# Altium PCB PA_Combined_RX_TX.PcbDoc (part 1 of 3)
Units mil, origin at the board's own origin, x right, y up, seen from the top; angles counter-clockwise.
Board outline 4035 x 2725 mil, 4 copper layers (Top Layer, Layer 1, Layer 2, Bottom Layer), stack 23.756 mil thick; 184 components, 134 nets, 615 pads, 730 vias.
Unrouted connection lines stored in the file: 3.
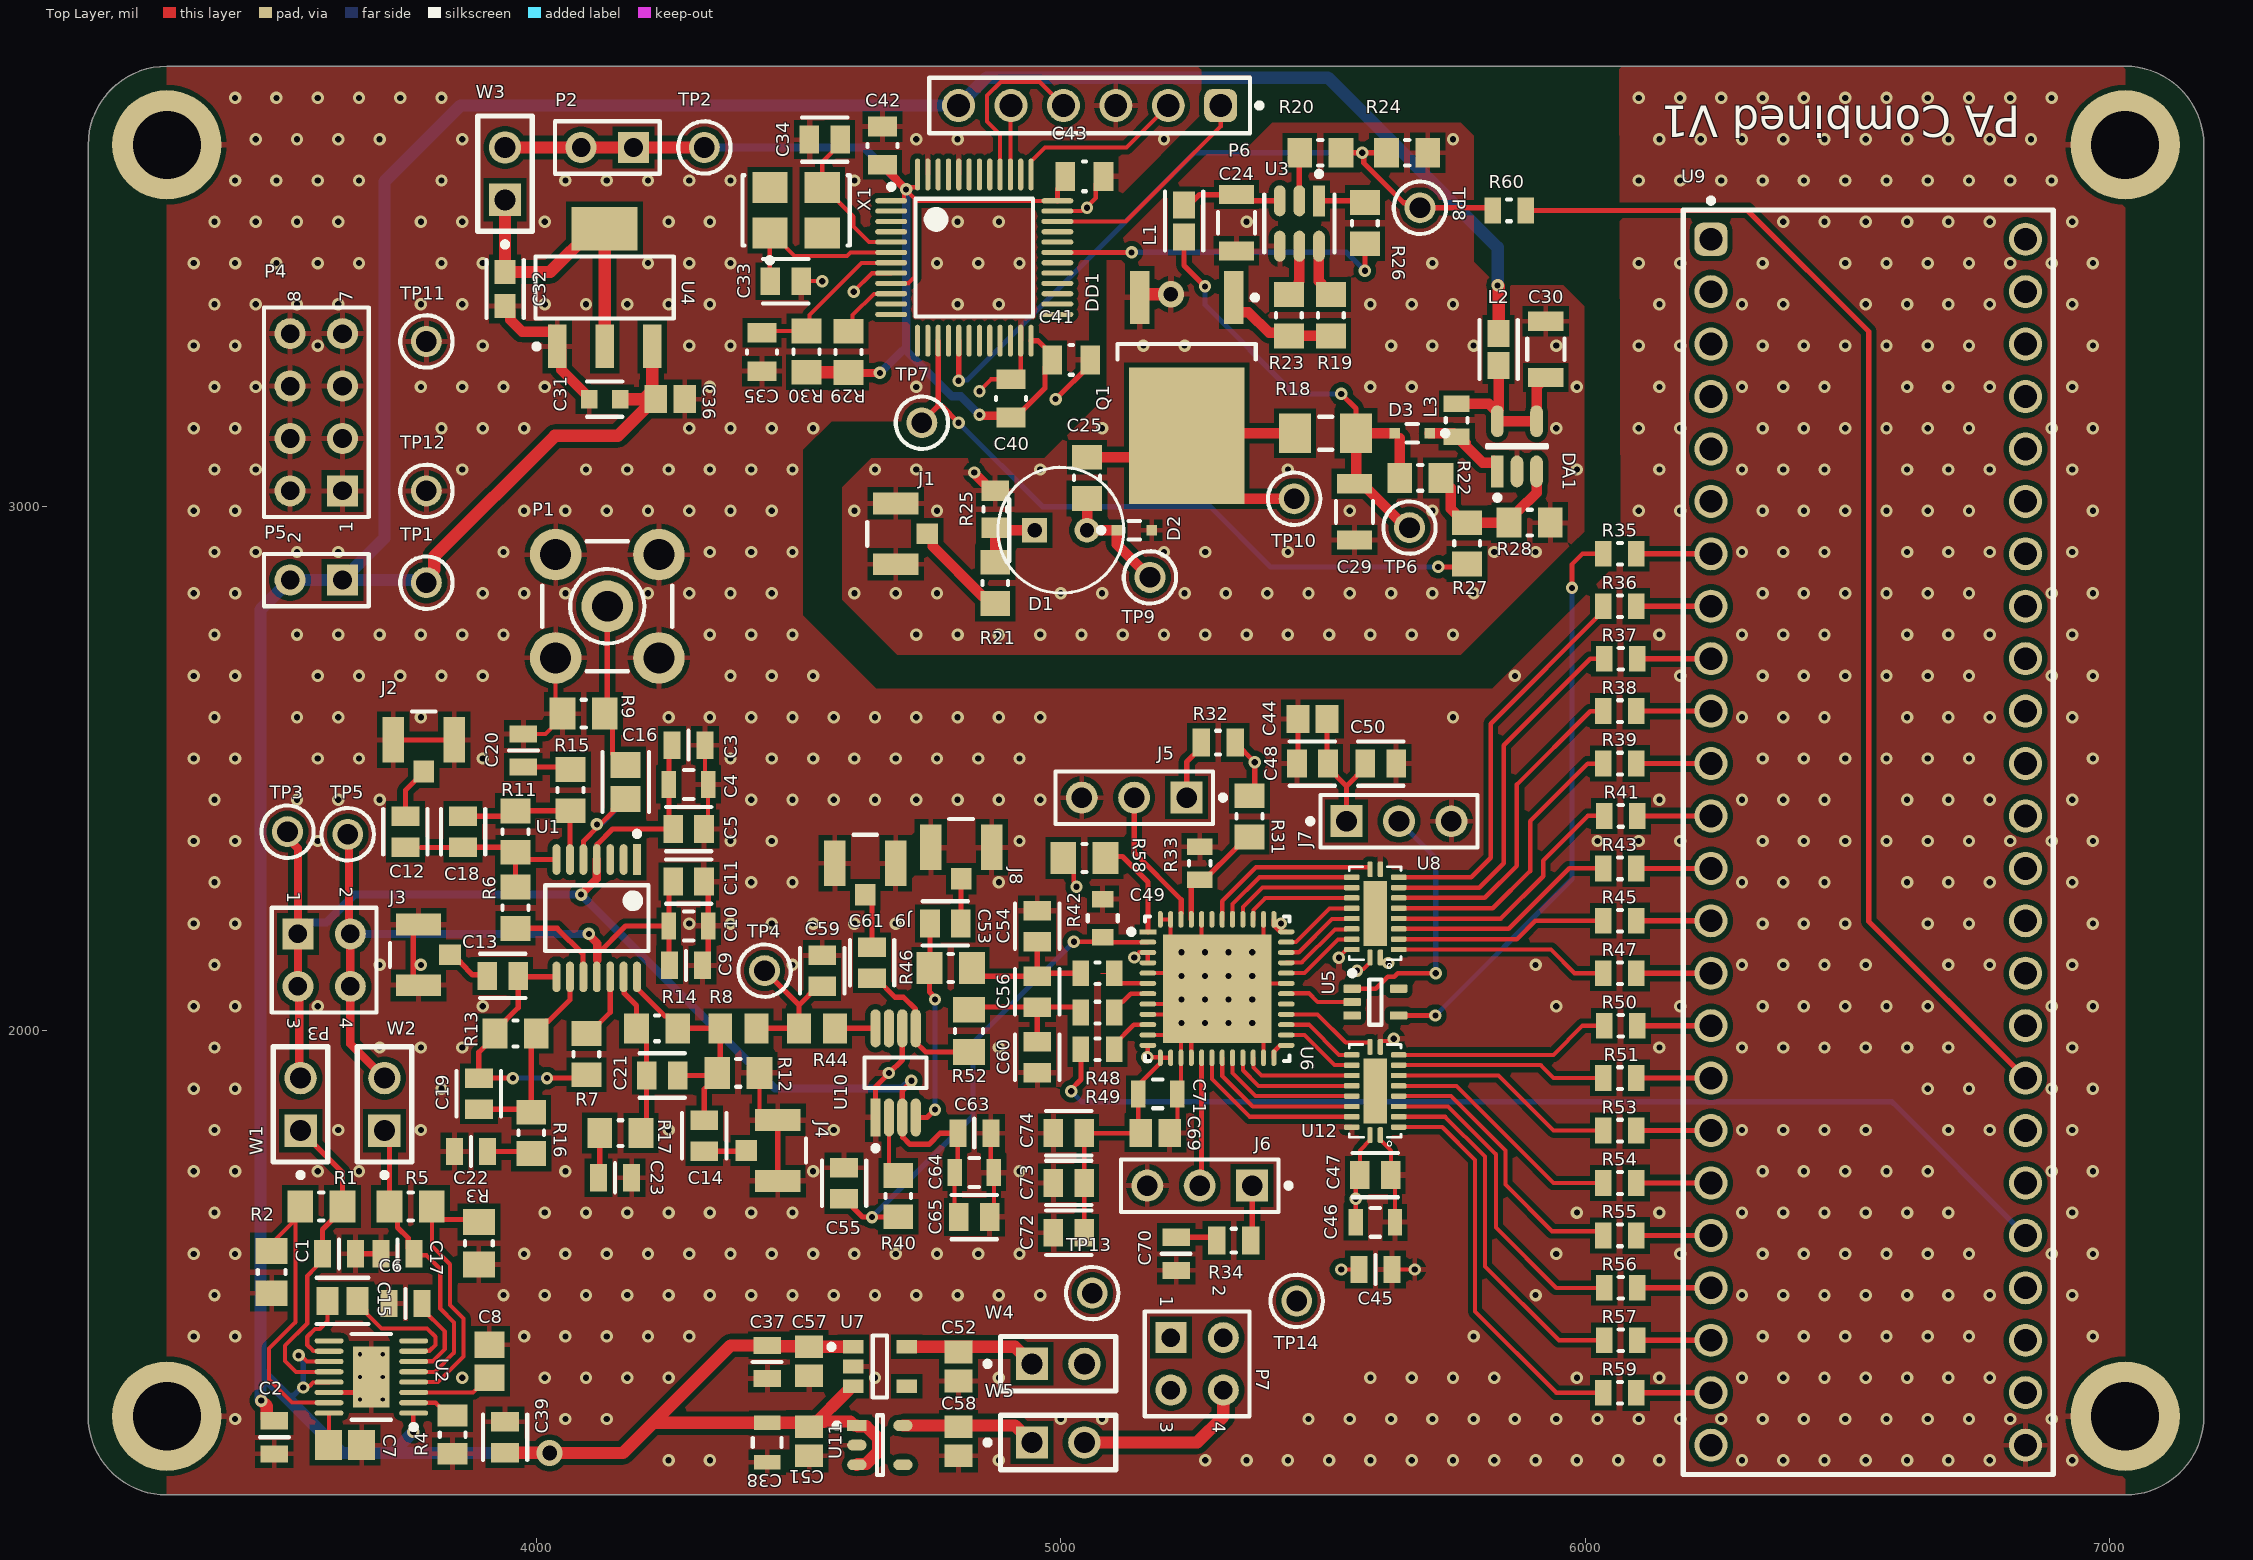
[diagram p0: Top Layer view]
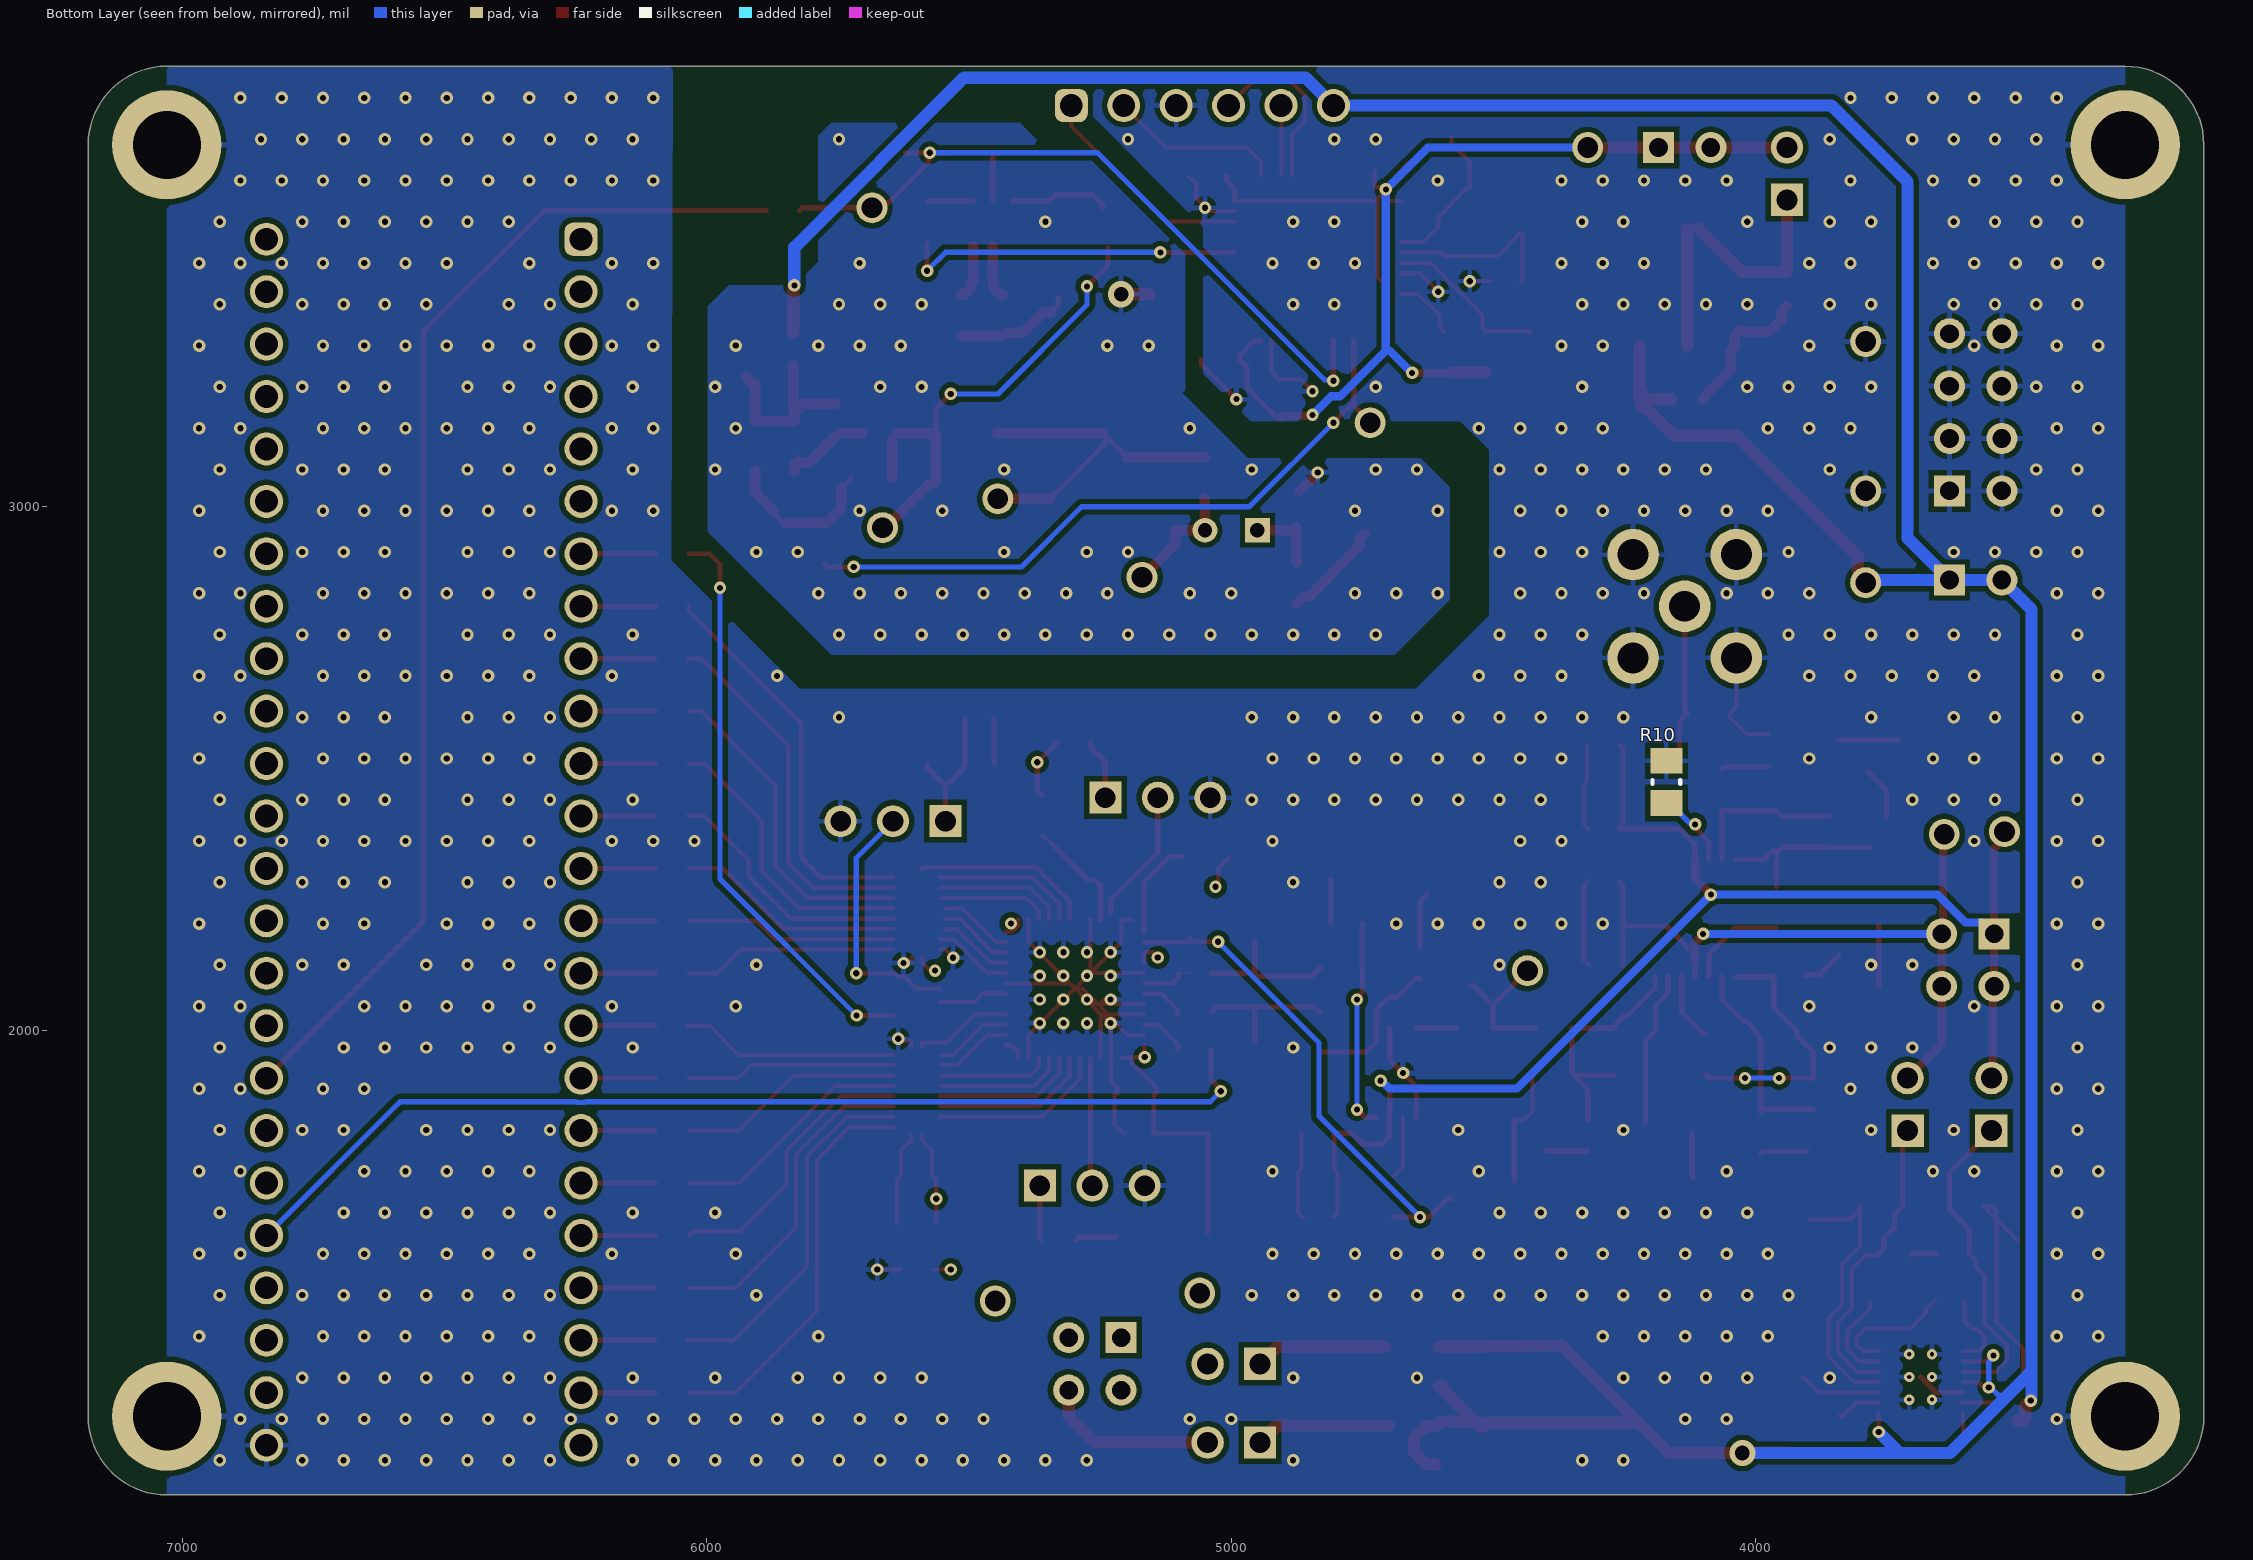
[diagram p1: Bottom Layer view, seen from below]
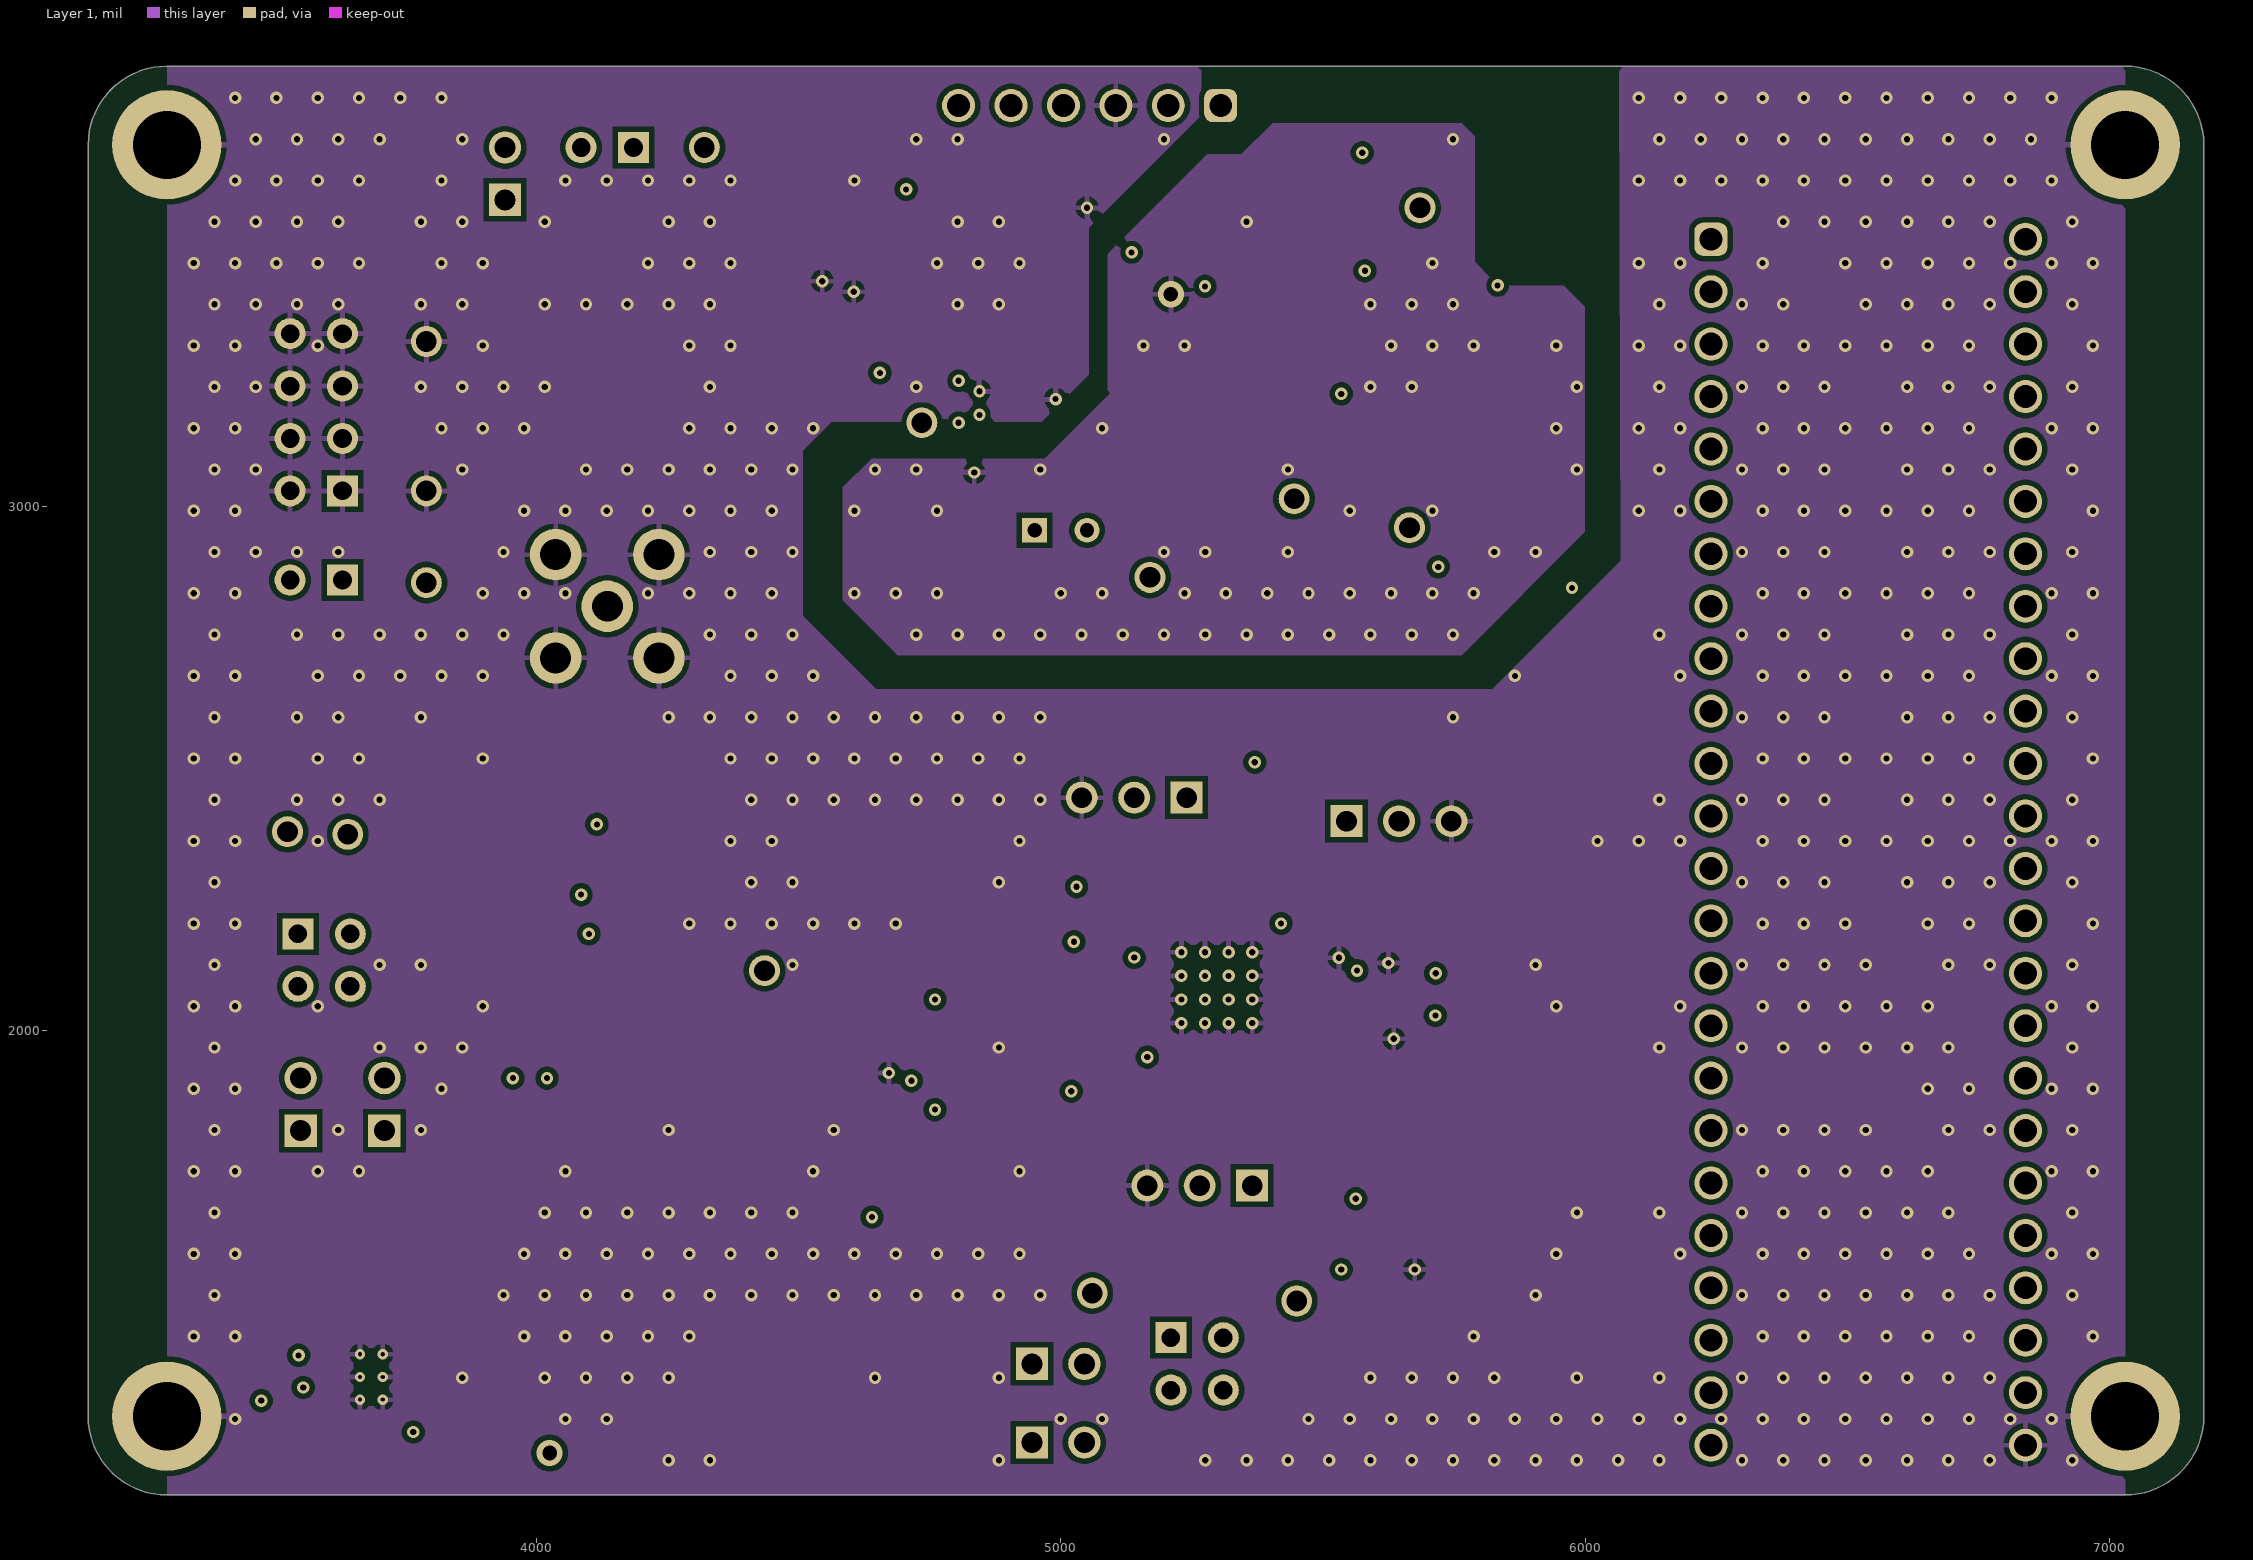
[diagram p2: Layer 1]
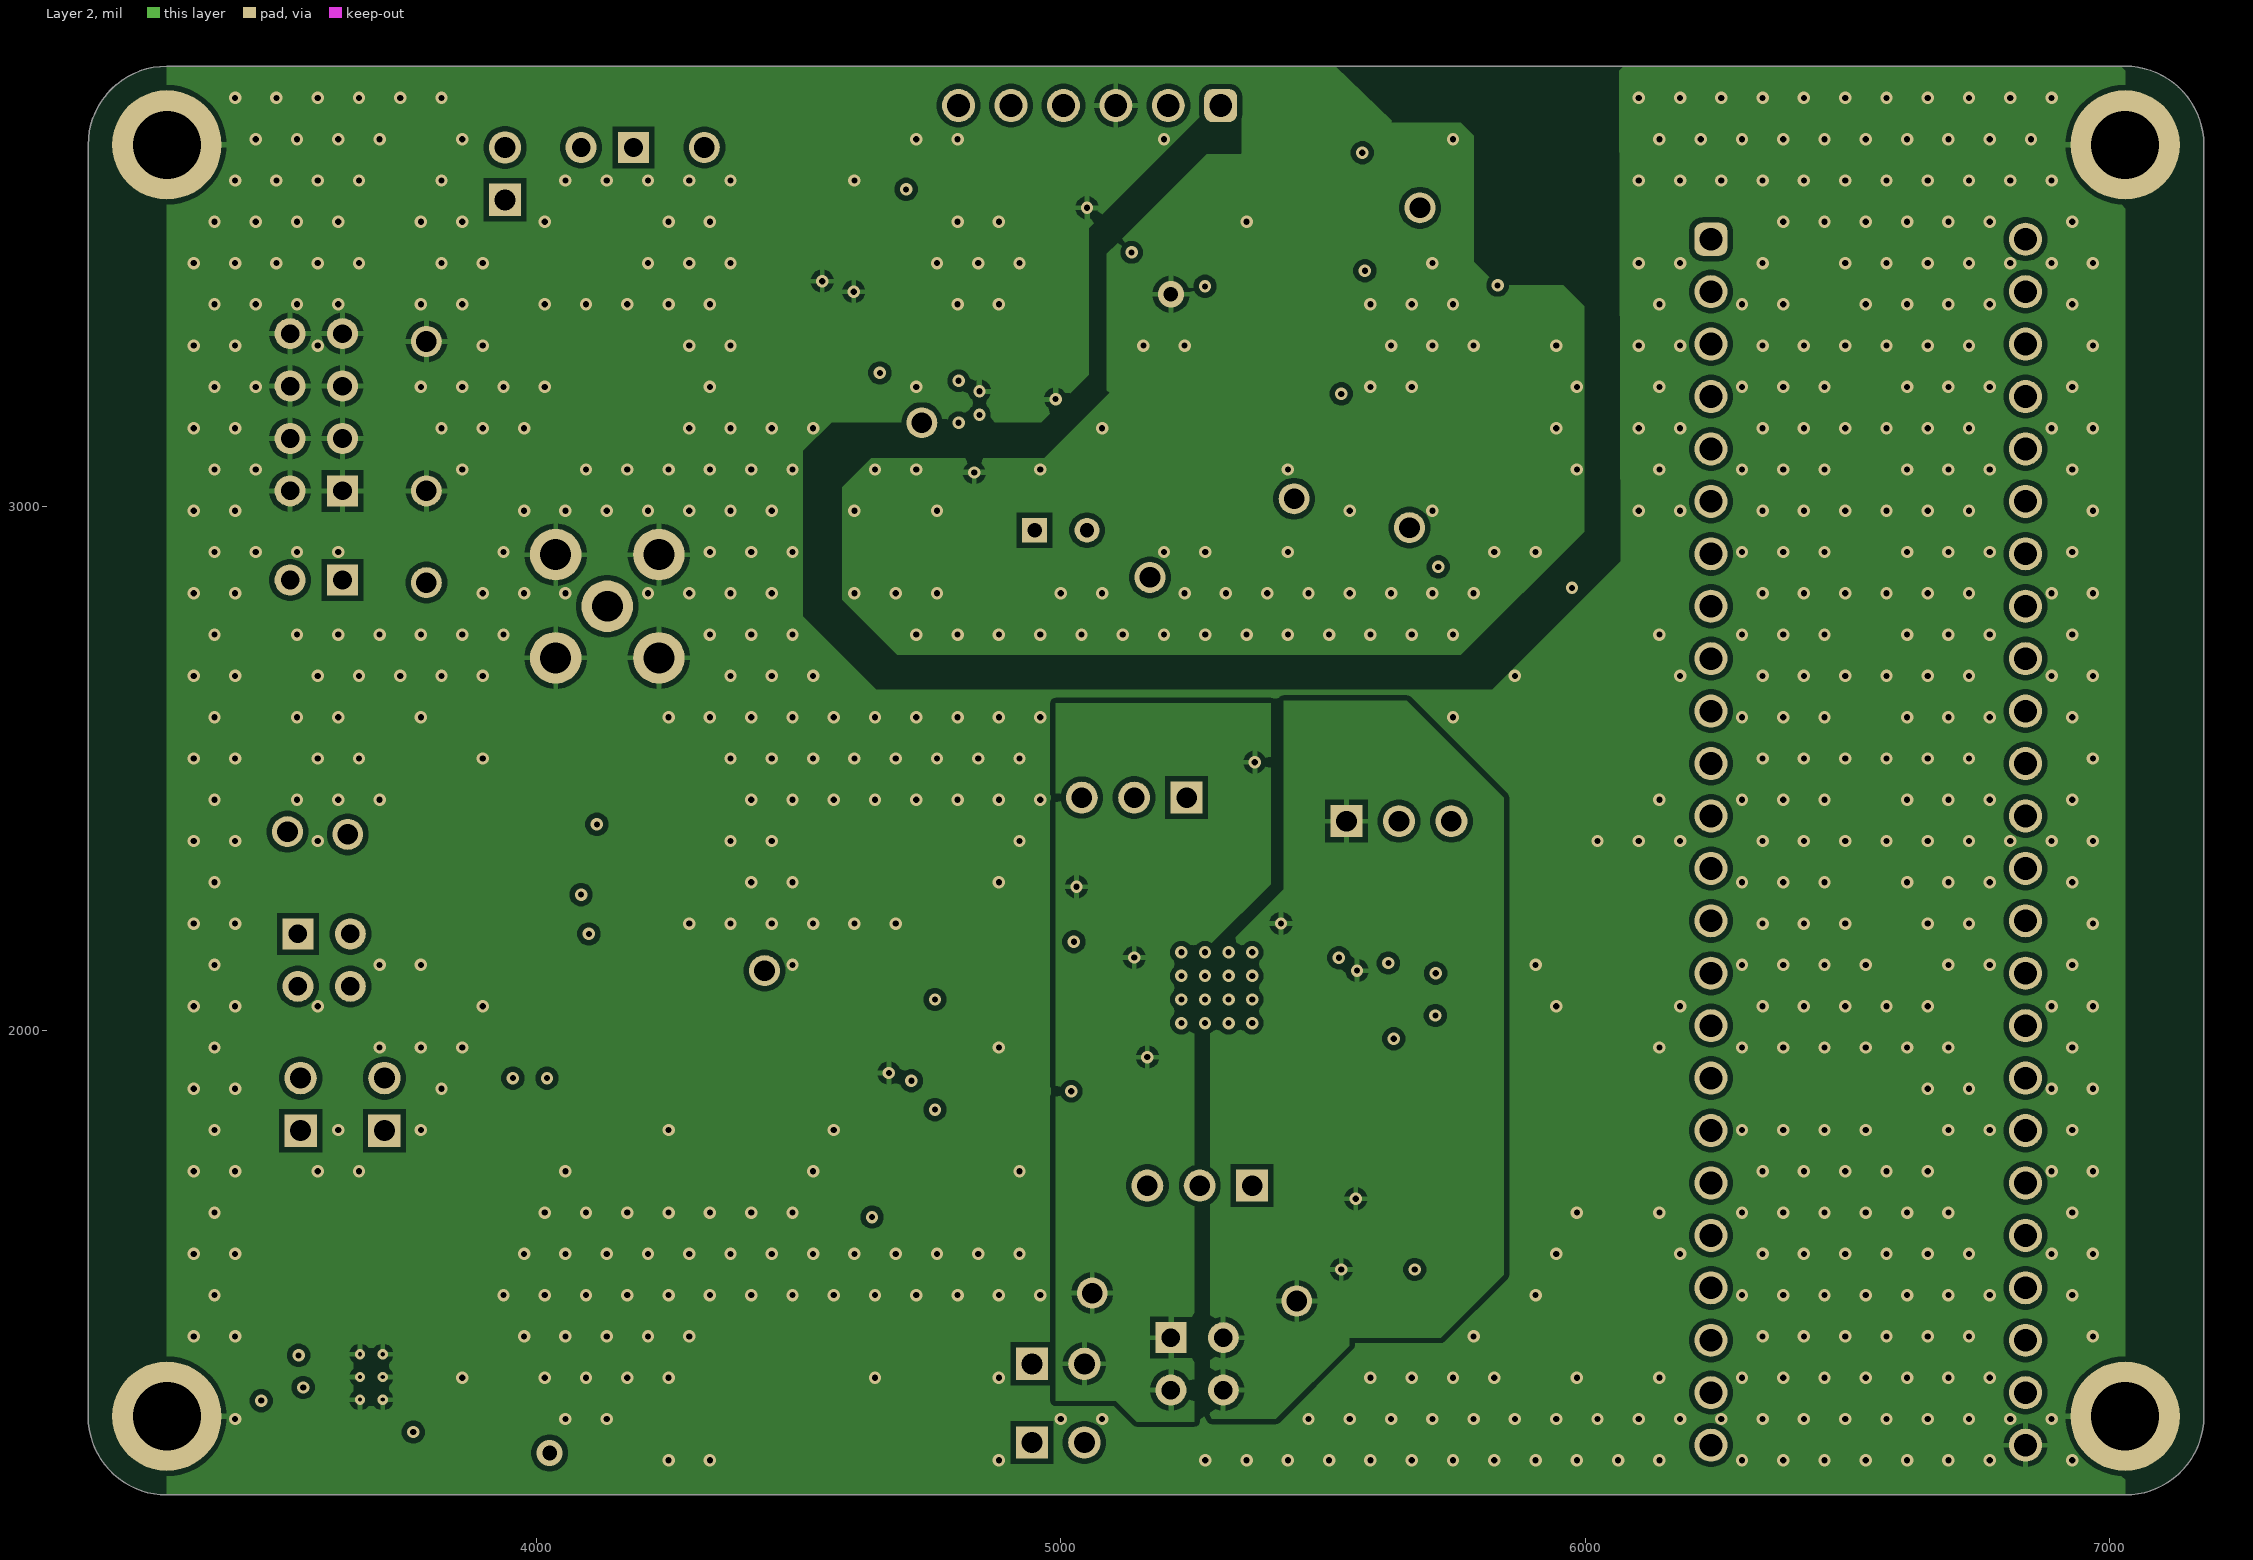
[diagram p3: Layer 2]

## Layer stack, top to bottom
Top Solder: solder mask 0.4, Solder Resist, Dk 3.5
Top Layer: signal copper 1.4
Dielectric 2: prepreg 2.8, PP-006, Dk 4.1
Layer 1: signal copper 1.378
Dielectric 1: dielectric 12.6, FR-4, Dk 4.8
Layer 2: signal copper 1.378
Dielectric 3: prepreg 2.8, PP-006, Dk 4.1
Bottom Layer: signal copper 1.4
Bottom Solder: solder mask 0.4, Solder Resist, Dk 3.5

## Board outline
3145,1265 ccw(c3295,1265) 3295,1115 7030,1115 ccw(c7030,1265) 7180,1265 7180,3690 ccw(c7030,3690) 7030,3840 3295,3840 ccw(c3295,3690) 3145,3690

## Design rules (kind name [scope] priority, off if disabled: settings)
Clearance [All] p1: gap=10 ignorepadtopadclearanceinfootprint=FALSE
ComponentClearance IgnoreLaserDiodeLol [InComponent('D1')] p1: gap=-999 collisioncheckmode=3 verticalgap=-999 showdistances=FALSE
ComponentClearance [All] p2: gap=10 collisioncheckmode=3 verticalgap=10 showdistances=FALSE
PolygonConnect [All] p1: connectstyle=Relief reliefconductorwidth=10 reliefentries=4 polygonreliefangle="90 Angle" airgapwidth=10
RoutingVias [All] p1: holewidth=11.81 width=23.62 viastyle="Through Hole" minholewidth=10 minwidth=19.68 maxholewidth=39.37 maxwidth=78.74
SolderMaskExpansion [All] p1: expansion=0 istentingtop=FALSE
SupplyNets "Schematic Supply Nets_3" [InNet('3V3')] p1: voltage=0.000
SupplyNets "Schematic Supply Nets_2" [InNet('VLASER')] p2: voltage=0.000
SupplyNets "Schematic Supply Nets_1" [InNet('GND')] p3: voltage=0.000
SupplyNets "Schematic Supply Nets" [InNet('VIN')] p4: voltage=0.000
Width [All] p1: maxlimit=23.62 minlimit=7.87 preferedwidth=10 midlayer1_minwidth=10 midlayer2_minwidth=10 bottomlayer_minwidth=10 minimp=50.000000 maximp=50.000000 favimp=50.000000
29 further rules are at their usual default settings.

## Components (designator, comment, footprint, x,y, rotation, side; value= is the part's Value field where it differs from the comment)
C1 "CL21B106KOQNNNG" FP-CL21B106KOQNNNG-MFG 3623.5,1575 r0 top value=10uF
C2 "CL21B106KOQNNNG" FP-CL21B106KOQNNNG-MFG 3500,1225 r270 top value=10uF
C3 "CL21B106KOQNNNG" FP-CL21B106KOQNNNG-MFG 4290,2545 r0 top value=10uF
C4 "GRM21BR71C475KE51K" FP-GRM21B-0_15-MFG 4290,2470 r0 top
C5 "C0805C104K5RACTU" FP-C0805C-DN-MFG 4290,2385 r0 top value="0.10 μF"
C6 "CL21B106KOQNNNG" FP-CL21B106KOQNNNG-MFG 3750,1480 r180 top value=10uF
C7 "C0805F103K5RACTU" CAPC2013X100X50NL20T25 3635,1210 r180 top
C8 "C0805F103K5RACTU" CAPC2013X100X50NL20T25 3910,1370 r270 top
C9 "CL21B106KOQNNNG" FP-CL21B106KOQNNNG-MFG 4285,2125 r0 top value=10uF
C10 "GRM21BR71C475KE51K" FP-GRM21B-0_15-MFG 4290,2200 r0 top
C11 "C0805C104K5RACTU" FP-C0805C-DN-MFG 4290,2285 r0 top value="0.10 μF"
C12 "C0805C102K5RACTU" FP-C0805C-DN-MFG 3750,2380 r270 top value="1,000 pF"
C13 "C0805C102K5RACTU" FP-C0805C-DN-MFG 3935.47,2105 r0 top value="1,000 pF"
C14 "C0805C102K5RACTU" FP-C0805C-DN-MFG 4320,1800 r90 top value="1,000 pF"
C15 "CL21B105KAFNNNG" FP-CL21-IPC_C 3630,1485 r0 top
C16 "CL21B222JBANNNC" FP-CL21-IPC_B 4170,2475 r270 top
C17 "CL21B106KOQNNNG" FP-CL21B106KOQNNNG-MFG 3735,1575 r180 top value=10uF
C18 "C0805C150K5RACTU" FP-C0805C-DN-MFG 3860,2380 r270 top value="15 pF"
C19 "C0805C150K5RACTU" FP-C0805C-DN-MFG 3890,1880 r90 top value="15 pF"
C20 "CL21B106KOQNNNG" FP-CL21B106KOQNNNG-MFG 3975,2535 r90 top value=10uF
C21 "C0805C150K5RACTU" FP-C0805C-DN-MFG 4239.53,1915 r0 top value="15 pF"
C22 "CL21B106KOQNNNG" FP-CL21B106KOQNNNG-MFG 3875,1770 r180 top value=10uF
C23 "CL21B106KOQNNNG" FP-CL21B106KOQNNNG-MFG 4150,1720 r0 top value=10uF
C24 "10uF" FP-CL31B106KBHNNNE-MFG 5335,3541.36 r90 top
C25 "20nF" RESC2013X60X35ML10T20 5050,3055 r90 top
C29 "10uF" FP-CL31B106KBHNNNE-MFG 5560,2990 r90 top
C30 "10uF" FP-CL31B106KBHNNNE-MFG 5925,3300 r270 top
C31 "" FP-CC0603-DA-MFG 4130,3205 r180 top value="100 nF"
C32 "" FP-CL10-IPC_A 3940,3415 r270 top
C33 "C0805C100J5RACTU" FP-C0805C-DN-MFG 4475.47,3430 r180 top value="10 pF"
C34 "" FP-C0805C-DN-MFG 4550,3700 r0 top value="10 pF"
C35 "100nF" FP-CC0805-0_85-MFG 4430,3295 r270 top value="100 nF"
C36 "C0805C105K3RACTU" CAPC2013X140X50LL20T25 4255,3205 r180 top
C37 "CL21B106KOQNNNG" FP-CL21B106KOQNNNG-MFG 4440,1368.5 r270 top value=10uF
C38 "GRM21BR71C475KE51K" FP-GRM21B-0_15-MFG 4440,1215 r270 top
C39 "C0805C104K5RACTU" FP-C0805C-DN-MFG 3940,1225 r90 top value="0.10 μF"
C40 "CC0805KRX7R9BB104" FP-CC0805-0_85-MFG 4905,3206.42 r90 top value="100 nF"
C41 "CC0805KRX7R9BB104" FP-CC0805-0_85-MFG 5020,3280 r0 top value="100 nF"
C42 "CC0805KRX7R9BB104" FP-CC0805-0_85-MFG 4660,3688.58 r90 top value="100 nF"
C43 "CC0805KRX7R9BB104" FP-CC0805-0_85-MFG 5045,3630 r0 top value="100 nF"
C44 "C0805C105K3RACTU" CAPC2013X140X50LL20T25 5480,2595 r0 top
C45 "CL21B106KOQNNNG" FP-CL21B106KOQNNNG-MFG 5600,1545 r0 top value=10uF
C46 "GRM21BR71C475KE51K" FP-GRM21B-0_15-MFG 5600,1635 r0 top
C47 "C0805C104K5RACTU" FP-C0805C-DN-MFG 5600,1725 r0 top value="0.10 μF"
C48 "C0805C104K5RACTU" FP-C0805C-DN-MFG 5480,2510 r180 top value="0.10 μF"
C49 "C2012X7R1C225K125AB" FP-C2012-125-0_2-MFG 5080,2215 r90 top
C50 "C0805C104K5RACTU" FP-C0805C-DN-MFG 5610,2510 r0 top value="0.10 μF"
C51 "C0805C105K3RACTU" CAPC2013X140X50LL20T25 4520,1217.44 r90 top
C52 "C0805C105K3RACTU" CAPC2013X140X50LL20T25 4805,1360 r90 top
C53 "C0805C102K5RACTU" FP-C0805C-DN-MFG 4780,2205 r180 top value="1,000 pF"
C54 "C0805C100J5RACTU" FP-C0805C-DN-MFG 4955,2200 r270 top value="10 pF"
C55 "C0805C104K5RACTU" FP-C0805C-DN-MFG 4586.65,1709.53 r90 top value="0.10 μF"
C56 "C0805C100J5RACTU" FP-C0805C-DN-MFG 4955,2075 r270 top value="10 pF"
C57 "C0805C105K3RACTU" CAPC2013X140X50LL20T25 4520,1370 r90 top
C58 "C0805C105K3RACTU" CAPC2013X140X50LL20T25 4805,1217.44 r90 top
C59 "C0805C100J5RACTU" FP-C0805C-DN-MFG 4545,2115 r90 top value="10 pF"
C60 "C0805C100J5RACTU" FP-C0805C-DN-MFG 4955,1950 r270 top value="10 pF"
C61 "C0805C102K5RACTU" FP-C0805C-DN-MFG 4640,2130 r90 top value="1,000 pF"
C63 "CL21B106KOQNNNG" FP-CL21B106KOQNNNG-MFG 4835,1805 r0 top value=10uF
C64 "GRM21BR71C475KE51K" FP-GRM21B-0_15-MFG 4835,1730 r0 top
C65 "C0805C104K5RACTU" FP-C0805C-DN-MFG 4835,1645 r0 top value="0.10 μF"
C69 "C0805C105K3RACTU" CAPC2013X140X50LL20T25 5180,1805 r180 top
C70 "CL21B106KOQNNNG" FP-CL21B106KOQNNNG-MFG 5220,1575 r270 top value=10uF
C71 "GRM21BR71C475KE51K" FP-GRM21B-0_15-MFG 5185,1880 r0 top
C72 "C0805C104K5RACTU" FP-C0805C-DN-MFG 5015.47,1615 r180 top value="0.10 μF"
C73 "C0805C104K5RACTU" FP-C0805C-DN-MFG 5015,1710 r180 top value="0.10 μF"
C74 "C0805C104K5RACTU" FP-C0805C-DN-MFG 5015,1805 r180 top value="0.10 μF"
D1 "Light-Emitting Diode" FP-DPGEW1S09H-MFG 5000,2955 r0 top
D2 "Schottky Diode" FP-PG-SC79-2-MFG 5140,2955 r0 top
D3 "Schottky Diode" FP-PG-SC79-2-MFG 5670,3140 r180 top
DA1 "MIC2288YD5-TR" FP-TSOT-5LD-PL-1-IPC_A 5870,3115 r90 top
DD1 "STM32F303CBT6" STM-LQFP48_L 4835,3475 r0 top
J1 "U.FL-R-SMT(10)" FP-U_FL-R-SMT_10-MFG 4685,2948.07 r270 top
J2 "U.FL-R-SMT-1(10)" FP-U_FL-R-SMT-1_10-MFG 3785,2555 r180 top
J3 "U.FL-R-SMT-1(10)" FP-U_FL-R-SMT-1_10-MFG 3775,2145 r270 top
J4 "U.FL-R-SMT-1(10)" FP-U_FL-R-SMT-1_10-MFG 4460,1771.93 r90 top
J5 "90120-0123" FP-90120-0123-MFG 5140,2445 r180 top
J6 "90120-0123" FP-90120-0123-MFG 5265,1705 r180 top
J7 "90120-0123" FP-90120-0123-MFG 5645,2400 r0 top
J8 "U.FL-R-SMT-1(10)" FP-U_FL-R-SMT-1_10-MFG 4810,2350 r180 top
J9 "U.FL-R-SMT-1(10)" FP-U_FL-R-SMT-1_10-MFG 4626.93,2320 r180 top
L1 "BEAD" FP-BLM18-0_15-t0_8-IPC_A 5235,3544.45 r90 top
L2 "BEAD" FP-BLM18-0_15-t0_8-IPC_A 5835,3300 r90 top
L3 "Inductor" RESC2013X60X35LL10T20 5755,3165 r270 top value=10uH
P1 "SMB" SMB_V-RJ45 4135,2810 r270 top
P2 "Header 2" HDR1X2 4185,3685 r180 top
P3 "Header 2X2" HDR2X2 3545,2185 r270 top
P4 "Header 4X2" HDR2X4 3630,3030 r90 top
P5 "Header 2" HDR1X2 3630,2860 r180 top
P6 "61300611121" 61300611121 5055,3765 r180 top
P7 "Header 2X2" HDR2X2 5210,1415 r270 top
Q1 "" INF-PG-TO252-3-313_N 5240,3227.52 r270 top
R1 "63k" RESC2013X60X30ML20T20 3589.64,1665 r0 top
R2 "20k" RESC2013X60X30ML20T20 3495,1540 r90 top
R3 "20k" RESC2013X60X30ML20T20 3890,1595 r270 top
R4 "CRCW0805200KFKEA" RESC2013X50X30NL20T20 3840,1230 r90 top
R5 "63k" RESC2013X60X30ML20T20 3760,1665 r0 top
R6 "RC0805FR-071KL" RESC2013X60X35ML10T20 3960,2235 r270 top
R7 "RC0805FR-071KL" RESC2013X60X35ML10T20 4095,1955.63 r90 top
R8 "ERJ-6GEY0R00V" RESC2013X70X40NL20T20 4385,2005 r0 top
R9 "RK73B2ATTD510J" RESC2013X60X30ML20T20 4090,2605 r0 top
R10 "RK73B2ATTD510J" RESC2013X60X30ML20T20 4170,2475 r270 bottom
R11 "RC0805FR-071KL" RESC2013X60X35ML10T20 3960,2380 r270 top
R12 "RK73B2ATTD510J" RESC2013X60X30ML20T20 4385,1920 r180 top
R13 "RC0805FR-071KL" RESC2013X60X35ML10T20 3960,1995 r180 top
R14 "RC0805FR-071KL" RESC2013X60X35ML10T20 4230,2005 r0 top
R15 "RC0805FR-07100RL" RESC2013X60X35ML10T20 4065,2459.37 r90 top
R16 "RC0805FR-07100RL" RESC2013X60X35ML10T20 3990,1805.63 r270 top
R17 "RC0805FR-07100RL" RESC2013X60X35ML10T20 4160,1805 r180 top
R18 "270" FP-CL31B106KBHNNNE-IPC_A 5505,3140 r0 top
R19 "15" RESC2013X60X35ML10T20 5515,3365 r90 top
R20 "1K" RESC2013X60X35ML10T20 5495,3675 r0 top
R21 "47" RESC2013X60X35ML10T20 4875,2854.37 r270 top
R22 "84.6K" RESC2013X60X35ML10T20 5685.63,3055 r180 top
R23 "0" RESC2013X60X35ML10T20 5435,3365 r90 top
R24 "1K" RESC2013X60X35ML10T20 5660.63,3675 r180 top
R25 "0.1" RESC2013X60X35NL10T20 4875,2995 r270 top
R26 "1K" RESC2013X60X35ML10T20 5580,3540.63 r90 top
R27 "10K" RESC2013X60X35ML10T20 5775,2930 r90 top
R28 "4.7K" RESC2013X60X35ML10T20 5894.29,2969.37 r180 top
R29 "NC" RESC2013X60X35ML10T20 4595,3295 r90 top
R30 "10K" RESC2013X60X35ML10T20 4515,3295.63 r90 top
R31 "RC0805FR-071KL" RESC2013X60X35ML10T20 5360,2409.37 r90 top
R32 "RK73H2ATTD1002F" RESC2013X60X30LL20T20 5300,2550 r0 top
R33 "Resistor" RESC2013X60X35LL10T20 5265,2320 r270 top value=open
R34 "RK73H2ATTD1002F" RESC2013X60X30LL20T20 5330,1600 r180 top
R35 "RC0805FR-0733RL" RESC2013X60X35LL10T20 6066.5,2910 r0 top
R36 "RC0805FR-0733RL" RESC2013X60X35LL10T20 6066.5,2810 r0 top
R37 "RC0805FR-0733RL" RESC2013X60X35LL10T20 6067.99,2710 r0 top
R38 "RC0805FR-0733RL" RESC2013X60X35LL10T20 6066.5,2610 r0 top
R39 "RC0805FR-0733RL" RESC2013X60X35LL10T20 6066.5,2510 r0 top
R40 "RC0805FR-07100RL" RESC2013X60X35ML10T20 4690,1685 r90 top
R41 "RC0805FR-0733RL" RESC2013X60X35LL10T20 6067.99,2410 r0 top
R42 "RC0805JR-075R1L" RESC2013X60X35LL10T20 5070,2110 r0 top
R43 "RC0805FR-0733RL" RESC2013X60X35LL10T20 6066.5,2310 r0 top
R44 "ERJ-6GEY0R00V" RESC2013X70X40NL20T20 4535,2005 r0 top
R45 "RC0805FR-0733RL" RESC2013X60X35LL10T20 6066.5,2210 r0 top
R46 "RK73B2ATTD510J" RESC2013X60X30ML20T20 4790,2120 r180 top
R47 "RC0805FR-0733RL" RESC2013X60X35LL10T20 6066.5,2110 r0 top
R48 "RC0805JR-075R1L" RESC2013X60X35LL10T20 5070,2035 r0 top
R49 "RC0805FR-0733RL" RESC2013X60X35LL10T20 5070,1965 r0 top
R50 "RC0805FR-0733RL" RESC2013X60X35LL10T20 6067.99,2010 r0 top
R51 "RC0805FR-0733RL" RESC2013X60X35LL10T20 6066.5,1910 r0 top
R52 "RK73B2ATTD510J" RESC2013X60X30ML20T20 4825,2000 r270 top
R53 "RC0805FR-0733RL" RESC2013X60X35LL10T20 6066.5,1810 r0 top
R54 "RC0805FR-0733RL" RESC2013X60X35LL10T20 6066.5,1710 r0 top
R55 "RC0805FR-0733RL" RESC2013X60X35LL10T20 6066.5,1610 r0 top
R56 "RC0805FR-0733RL" RESC2013X60X35LL10T20 6067.99,1510 r0 top
R57 "RC0805FR-0733RL" RESC2013X60X35LL10T20 6067.99,1410 r0 top
R58 "RK73H2ATTD10R0F" RESC2013X60X30ML20T20 5045,2330 r180 top
R59 "RC0805FR-0733RL" RESC2013X60X35LL10T20 6066.5,1310 r0 top
R60 "RC0805FR-0733RL" RESC2013X60X35LL10T20 5855,3565 r180 top
TP1 "5003" TP_TH 3790,2855 r90 top
TP2 "5003" TP_TH 4320.21,3685 r0 top
TP3 "5003" TP_TH 3525,2380 r0 top
TP4 "5003" TP_TH 4435,2115 r0 top
TP5 "5003" TP_TH 3640,2375 r90 top
TP6 "5003" TP_TH 5665,2960 r0 top
TP7 "5003" TP_TH 4735,3160 r90 top
TP8 "5003" TP_TH 5685,3570 r0 top
TP9 "5003" TP_TH 5170,2865 r0 top
TP10 "5003" TP_TH 5445,3015 r90 top
TP11 "5003" TP_TH 3790,3315 r90 top
TP12 "5003" TP_TH 3790,3030 r90 top
TP13 "5003" TP_TH 5060,1500 r90 top
TP14 "5003" TP_TH 5450,1485 r90 top
U1 "ADA4807-4ARUZ-R7" FP-RU-14-IPC_B 4115,2215 r270 top
U2 "LTC3260EMSE#TRPBF" LT-MSE-16-EDP_L 3685,1340 r180 top
U3 "UCC27531DBVR" FP-DBV0006A-IPC_B 5455,3540 r270 top
U4 "LD1117S33TR" SOT-223_L 4130,3417.8 r90 top
U5 "SN74AUC1G86DCKR" DCK0005A_N 5600,2055 r0 top
U6 "LTC2203CUK#TRPBF" FP-UK-48-05-08-1704-IPC_C 5298.06,2080.79 r0 top
U7 "MIC5501-3.0YM5-TR" FP-SOT23-5LD-PL-1-MFG 4655,1360 r0 top
U8 "74VCX245BQX" QFN21P50_450X250X80L40X24T305X105N 5599.69,2224.21 r90 top
U9 "CMOD_A7_35" "PCBComponent_1 - duplicate" 6145.59,2570.47 r0 top
U10 "LTC6363IMS8-0.5#PBF" FP-MS8-8-05-08-1660-IPC_A 4685,1920 r90 top
U11 "MIC5365-3.3YD5-TR" FP-TSOT-5LD-PL-1-IPC_C 4655,1210 r0 top
U12 "74VCX245BQX" QFN21P50_450X250X80L40X24T305X105N 5599.69,1885.47 r90 top
W1 "Jumper" FP-M20-9990246-MFG 3550,1860 r90 top
W2 "Jumper" FP-M20-9990246-MFG 3710,1860 r90 top
W3 "Jumper" FP-M20-9990246-MFG 3940,3635 r90 top
W4 "Jumper" FP-M20-9990246-MFG 4995,1365 r0 top
W5 "Jumper" FP-M20-9990246-MFG 4995,1215 r0 top
X1 "Quartz" FP-ASFL1-MFG 4495,3565 r0 top value="8 MHz"

## Footprints (in the part's own frame and the unit in brackets; to place one, negate y for a bottom-side part, rotate by r counter-clockwise, add the part's x,y. Pads: shape width x height; smd on the part's side, far side on the other; paste and mask are expansions set on the pad)
61300611121 [mm] "Pin Header, pitch 2.54 mm, THT, Vertical, single row, 6p"
  rrect50% 1.6x1.6 hole 1.1: 1(-6.35,0)
  round 1.6 hole 1.1: 2(-3.81,0) 3(-1.27,0) 4(1.27,0) 5(3.81,0) 6(6.35,0)
  silkscreen extent -8.34,-1.34 7.77,1.34, body extent -7.62,-1.27 7.62,1.27, height 8.57
CAPC2013X100X50NL20T25 [mm] "Chip Capacitor, 2-Leads, Body 2.00x1.25mm, IPC Medium Density"
  rect 1.3x1.45 smd: 1(-0.8,0) 2(0.8,0)
  body extent -1.1,-0.72 1.1,0.72, height 1
CAPC2013X140X50LL20T25 [mm] "Chip Capacitor, 2-Leads, Body 2.00x1.25mm, IPC High Density"
  rect 1.1x1.35 smd: 1(-0.7,0) 2(0.7,0)
  body extent -1.1,-0.72 1.1,0.72, height 1.4
DCK0005A_N [mm] "SOT23, 5-Leads, Body 2.15x1.4mm, Pitch 0.65mm, IPC Medium Density"
  rrect25% 0.85x0.4 smd: 1(-1.125,0.65) 2(-1.125,0) 3(-1.125,-0.65) 4(1.125,-0.65) 5(1.125,0.65)
  silkscreen extent -1.25,-1.1 0.3,1.52, body extent -1.14,-1 1.14,1, height 0.94
FP-90120-0123-MFG [mm]
  rect 1.55x1.55 hole 1 paste-2539.97 mask+0: 1(-2.54,0)
  round 1.55 hole 1 paste-2539.97 mask+0: 2(0,0) 3(2.54,0)
  silkscreen extent -4.43,-1.27 3.81,1.27, body extent -3.91,-1.37 3.91,1.37, height 0.25
FP-ASFL1-MFG [mm]
  rect 1.7x1.5 smd paste+0 mask+0: 1(-1.27,-1.1) 2(1.27,-1.1) 3(1.27,1.1) 4(-1.27,1.1)
  silkscreen extent -2.6,-2.54 2.6,1.7, body extent -2.7,-1.95 2.7,1.95, height 0.25
FP-BLM18-0_15-t0_8-IPC_A [mil]
  rect 51.42x41.66 smd paste+0 mask+0: 1(-30.55,0) 2(30.55,0)
  silkscreen extent -56,-37 56,37, body extent -76,-41 76,41, height 10
FP-C0805C-DN-MFG [mm]
  rect 0.95x1.35 smd paste+0 mask+0: 1(-0.75,0) 2(0.75,0)
  silkscreen extent -1.1,-1.08 1.1,1.07, body extent -1.4,-0.85 1.4,0.85, height 0.25
FP-C2012-125-0_2-MFG [mm]
  rect 0.8x1.05 smd paste+0 mask+0: 1(-0.925,0) 2(0.925,0)
  silkscreen extent -0.15,-0.73 0.15,0.73, body extent -1.43,-0.82 1.43,0.82, height 0.25
FP-CC0603-DA-MFG [mm]
  rect 0.8x0.9 smd paste+0 mask+0: 1(-0.75,0) 2(0.75,0)
  silkscreen extent -0.85,-0.85 0.85,0.85, body extent -1.35,-0.75 1.35,0.75, height 0.25
FP-CC0805-0_85-MFG [mm]
  rect 0.95x1.4 smd paste+0 mask+0: 1(-0.925,0) 2(0.925,0)
  silkscreen extent -0.07,-0.73 0.07,0.73, body extent -1.6,-1.05 1.6,1.05, height 0.25
FP-CL10-IPC_A [mil]
  rect 45.6x39.85 smd paste+0 mask+0: 1(-32.56,0) 2(32.56,0)
  silkscreen extent -55,-36 55,36, body extent -75,-40 75,40, height 10
FP-CL21-IPC_B [mil]
  rect 49.4x57.33 smd paste+0 mask+0: 1(-32.51,0) 2(32.51,0)
  silkscreen extent -57,-44 57,44, body extent -67,-39 67,39, height 10
FP-CL21-IPC_C [mil]
  rect 41.52x53.39 smd paste+0 mask+0: 1(-28.57,0) 2(28.57,0)
  silkscreen extent -49,-44 49,44, body extent -53,-32 53,32, height 10
FP-CL21B106KOQNNNG-MFG [mm]
  rect 0.825x1.325 smd paste+0 mask+0: 1(-0.8,0) 2(0.8,0)
  silkscreen extent 0,-0.7 0,0.7, body extent -1.31,-0.8 1.31,0.8, height 0.25
FP-CL31B106KBHNNNE-IPC_A [mil]
  rect 61.2x75.05 smd paste+0 mask+0: 1(-58.11,0) 2(58.11,0)
  silkscreen extent -13,-31 13,31, body extent -108,-57 108,57, height 10
FP-CL31B106KBHNNNE-MFG [mm]
  rect 0.925x1.7 smd paste+0 mask+0: 1(-1.363,0) 2(1.363,0)
  silkscreen extent -0.53,-0.9 0.53,0.9, body extent -1.92,-1 1.92,1, height 0.25
FP-DBV0006A-IPC_B [mm]
  rect 1.505x0.57 smd paste+0 mask+0: 1(-1.1,0.95)
  rrect100% 1.505x0.57 smd paste+0 mask+0: 2(-1.1,0) 3(-1.1,-0.95) 4(1.1,-0.95) 5(1.1,0) 6(1.1,0.95)
  silkscreen extent -2.53,-1.7 1.4,1.7, body extent -2.1,-1.7 2.1,1.7, height 0.25
FP-DPGEW1S09H-MFG [mm]
  rect 1.2x1.2 hole 0.7 paste-2539.97 mask+0: 1(-1.27,0)
  round 1.2 hole 0.7 paste-2539.97 mask+0: 2(1.27,0)
  silkscreen extent -3.05,-3.05 3.05,3.05, body extent -3.15,-3.15 3.15,3.15, height 0.25
FP-GRM21B-0_15-MFG [mm]
  rect 0.7x1.3 smd paste+0 mask+0: 1(-0.95,0) 2(0.95,0)
  silkscreen extent -0.22,-0.7 0.22,0.7, body extent -1.4,-0.8 1.4,0.8, height 0.25
FP-M20-9990246-MFG [mm]
  rect 1.57x1.57 hole 1.02 paste-2539.97 mask+0: 1(-1.27,0)
  round 1.57 hole 1.02 paste-2539.97 mask+0: 2(1.27,0)
  silkscreen extent -3.55,-1.32 2.79,1.32, body extent -2.89,-1.42 2.89,1.42, height 0.25
FP-MS8-8-05-08-1660-IPC_A [mm]
  rect 1.84x0.495 smd paste+0 mask+0: 1(-2.16,0.975)
  rrect100% 1.84x0.495 smd paste+0 mask+0: 2(-2.16,0.325) 3(-2.16,-0.325) 4(-2.16,-0.975) 5(2.16,-0.975) 6(2.16,-0.325) 7(2.16,0.325) 8(2.16,0.975)
  silkscreen extent -3.77,-1.5 0.74,1.5, body extent -3.58,-2 3.58,2, height 0.25
FP-PG-SC79-2-MFG [mil]
  rect 20x20 smd paste+0 mask+0: 1(-33.46,0) 2(33.46,0)
  silkscreen extent -68,-18 11,18, body extent -45,-22 45,22, height 10
FP-RU-14-IPC_B [mm]
  rect 1.488x0.381 smd paste+0 mask+0: 1(-2.841,1.95)
  rrect100% 1.488x0.381 smd paste+0 mask+0: 2(-2.841,1.3) 3(-2.841,0.65) 4(-2.841,0) 5(-2.841,-0.65) 6(-2.841,-1.3) 7(-2.841,-1.95) 8(2.841,-1.95) 9(2.841,-1.3) 10(2.841,-0.65) 11(2.841,0) 12(2.841,0.65) 13(2.841,1.3) 14(2.841,1.95)
  silkscreen extent -4.21,-2.5 1.6,2.5, body extent -3.84,-2.75 3.84,2.75, height 0.25
FP-SOT23-5LD-PL-1-MFG [mm]
  rect 1x0.66 smd paste+0 mask+0: 1(-1.3,0.95) 2(-1.3,0) 3(-1.3,-0.95) 4(1.3,-0.95) 5(1.3,0.95)
  silkscreen extent -2.47,-1.5 0.35,1.5, body extent -1.9,-1.6 1.9,1.6, height 0.25
FP-TSOT-5LD-PL-1-IPC_A [mm]
  rect 1.54x0.612 smd paste+0 mask+0: 1(-1.215,0.95)
  rrect100% 1.54x0.612 smd paste+0 mask+0: 2(-1.215,0) 3(-1.215,-0.95) 4(1.215,-0.95) 5(1.215,0.95)
  silkscreen extent -2.61,-1.45 0.05,1.45, body extent -2.49,-1.95 2.49,1.95, height 0.25
FP-TSOT-5LD-PL-1-IPC_C [mm]
  rect 0.94x0.532 smd paste+0 mask+0: 1(-1.116,0.95)
  rrect100% 0.94x0.532 smd paste+0 mask+0: 2(-1.116,0) 3(-1.116,-0.95) 4(1.116,-0.95) 5(1.116,0.95)
  silkscreen extent -2.21,-1.45 0.15,1.45
FP-U_FL-R-SMT-1_10-MFG [mm]
  rect 1x1.05 smd paste-1000 mask+0: 1(0,1.525)
  rect 1.05x2.2 smd paste-1000 mask+0: 2(-1.475,0) 3(1.475,0)
  silkscreen extent -0.57,-1.38 0.57,-1.38, body extent -2.1,-1.48 2.1,2.15, height 0.25
FP-U_FL-R-SMT_10-MFG [mm]
  rect 1x1.05 smd paste-1000 mask+0: 1(0,1.525)
  rect 1.05x2.2 smd paste-1000 mask+0: 2(-1.475,0) 3(1.475,0)
  silkscreen extent -0.57,-1.38 0.57,-1.38, body extent -2.1,-1.48 2.1,2.15, height 0.25
FP-UK-48-05-08-1704-IPC_C [mm]
  rect 0.81x0.242 smd paste+0 mask+0: 1(-3.351,2.75)
  rrect100% 0.81x0.242 smd paste+0 mask+0: 2(-3.351,2.25) 3(-3.351,1.75) 4(-3.351,1.25) 5(-3.351,0.75) 6(-3.351,0.25) 7(-3.351,-0.25) 8(-3.351,-0.75) 9(-3.351,-1.25) 10(-3.351,-1.75) 11(-3.351,-2.25) 12(-3.351,-2.75) 25(3.351,-2.75) 26(3.351,-2.25) 27(3.351,-1.75) 28(3.351,-1.25) 29(3.351,-0.75) 30(3.351,-0.25) 31(3.351,0.25) 32(3.351,0.75) 33(3.351,1.25) 34(3.351,1.75) 35(3.351,2.25) 36(3.351,2.75)
  rrect100% 0.242x0.81 smd paste+0 mask+0: 13(-2.75,-3.351) 14(-2.25,-3.351) 15(-1.75,-3.351) 16(-1.25,-3.351) 17(-0.75,-3.351) 18(-0.25,-3.351) 19(0.25,-3.351) 20(0.75,-3.351) 21(1.25,-3.351) 22(1.75,-3.351) 23(2.25,-3.351) 24(2.75,-3.351) 37(2.75,3.351) 38(2.25,3.351) 39(1.75,3.351) 40(1.25,3.351) 41(0.75,3.351) 42(0.25,3.351) 43(-0.25,3.351) 44(-0.75,3.351) 45(-1.25,3.351) 46(-1.75,3.351) 47(-2.25,3.351) 48(-2.75,3.351)
  rect 5.25x5.25 smd paste-1000 mask+0: 49(0,0)
  silkscreen extent -4.28,-3.5 3.5,3.5, body extent -3.86,-3.86 3.86,3.86, height 0.25
HDR1X2 [mm] "Connector; Header; 2 Position"
  rect 1.5x1.5 hole 0.9: 1(0,0)
  round 1.5 hole 0.9: 2(2.54,0)
  silkscreen extent -1.27,-1.27 3.81,1.27
HDR2X2 [mm] "Connector; Header; 2x2 Position"
  rect 1.5x1.5 hole 0.9: 1(0,0)
  round 1.5 hole 0.9: 2(0,2.54) 3(2.54,0) 4(2.54,2.54)
  silkscreen extent -1.27,-1.27 3.81,3.81
HDR2X4 [mm] "Connector; Header; 4x2 Position"
  rect 1.5x1.5 hole 0.9: 1(0,0)
  round 1.5 hole 0.9: 2(0,2.54) 3(2.54,0) 4(2.54,2.54) 5(5.08,0) 6(5.08,2.54) 7(7.62,0) 8(7.62,2.54)
  silkscreen extent -1.27,-1.27 8.89,3.81
INF-PG-TO252-3-313_N [mm] "DPAK, 3-Leads, Body 6.5x6.12mm, Pitch 2.28mm, IPC Medium Density"
  rect 2.55x0.95 smd: 1(-4.35,2.28) 3(-4.35,-2.28)
  rect 6.6x5.6 smd: 2(2.35,0)
  silkscreen extent -4.47,-3.35 -1.35,3.43, body extent -2.1,-3.32 4.12,3.32, height 2.35
LT-MSE-16-EDP_L [mm] "SOP, 16-Leads, Body 4.1x3.1mm, Pitch 0.5mm, Thermal Pad 2.95x1.76mm, IPC High Density"
  oval 1.4x0.25 smd: 1(-2.05,1.75) 2(-2.05,1.25) 3(-2.05,0.75) 4(-2.05,0.25) 5(-2.05,-0.25) 6(-2.05,-0.75) 7(-2.05,-1.25) 8(-2.05,-1.75) 9(2.05,-1.75) 10(2.05,-1.25) 11(2.05,-0.75) 12(2.05,-0.25) 13(2.05,0.25) 14(2.05,0.75) 15(2.05,1.25) 16(2.05,1.75)
  rect 1.76x2.95 smd: 17(0,0)
  silkscreen extent -2.18,-2.07 0.95,2.55, body extent -1.55,-2.05 1.55,2.05, height 1.1
"PCBComponent_1 - duplicate" [mm]
  rrect50% 1.6x1.6 hole 1.1: 1(2.398,23.864)
  round 1.6 hole 1.1: 2(2.398,21.324) 3(2.398,18.784) 4(2.398,16.244) 5(2.398,13.704) 6(2.398,11.164) 7(2.398,8.624) 8(2.398,6.084) 9(2.398,3.544) 10(2.398,1.004) 11(2.398,-1.536) 12(2.398,-4.076) 13(2.398,-6.616) 14(2.398,-9.156) 15(2.398,-11.696) 16(2.398,-14.236) 17(2.398,-16.776) 18(2.398,-19.316) 19(2.398,-21.856) 20(2.398,-24.396) 21(2.398,-26.936) 22(2.398,-29.476) 23(2.398,-32.016) 24(2.398,-34.556) 25(17.638,-34.556) 26(17.638,-32.016) 27(17.638,-29.476) 28(17.638,-26.936) 29(17.638,-24.396) 30(17.638,-21.856) 31(17.638,-19.316) 32(17.638,-16.776) 33(17.638,-14.236) 34(17.638,-11.696) 35(17.638,-9.156) 36(17.638,-6.616) 37(17.638,-4.076) 38(17.638,-1.536) 39(17.638,1.004) 40(17.638,3.544) 41(17.638,6.084) 42(17.638,8.624) 43(17.638,11.164) 44(17.638,13.704) 45(17.638,16.244) 46(17.638,18.784) 47(17.638,21.324) 48(17.638,23.864)
  silkscreen extent 1.05,-35.98 18.98,25.86
QFN21P50_450X250X80L40X24T305X105N [mm]
  rrect53% 0.76x0.26 smd: 1(-2.135,-0.25) 10(2.135,-0.25) 11(2.135,0.25) 20(-2.135,0.25)
  rrect53% 0.26x0.76 smd: 2(-1.75,-1.135) 3(-1.25,-1.135) 4(-0.75,-1.135) 5(-0.25,-1.135) 6(0.25,-1.135) 7(0.75,-1.135) 8(1.25,-1.135) 9(1.75,-1.135) 12(1.75,1.135) 13(1.25,1.135) 14(0.75,1.135) 15(0.25,1.135) 16(-0.25,1.135) 17(-0.75,1.135) 18(-1.25,1.135) 19(-1.75,1.135)
  rect 3.15x1.15 smd paste-3: 21(0,0)
  silkscreen extent -2.66,-1.25 2.25,1.25
RESC2013X50X30NL20T20 [mm] "Chip Resistor, 2-Leads, Body 2.00x1.25mm, IPC Medium Density"
  rect 1.05x1.45 smd: 1(-0.925,0) 2(0.925,0)
  silkscreen extent -0.1,-0.62 0.1,0.62, body extent -1.1,-0.72 1.1,0.72, height 0.5
RESC2013X60X30LL20T20 [mm] "Chip Resistor, 2-Leads, Body 2.00x1.25mm, IPC High Density"
  rect 0.85x1.35 smd: 1(-0.825,0) 2(0.825,0)
  silkscreen extent -0.1,-0.58 0.1,0.58, body extent -1.1,-0.72 1.1,0.72, height 0.6
RESC2013X60X30ML20T20 [mm] "Chip Resistor, 2-Leads, Body 2.00x1.25mm, IPC Low Density"
  rect 1.25x1.55 smd: 1(-1.025,0) 2(1.025,0)
  silkscreen extent -0.1,-0.67 0.1,0.67, body extent -1.1,-0.72 1.1,0.72, height 0.6
RESC2013X60X35LL10T20 [mm]
  rect 0.8x1.25 smd: 1(-0.8,0) 2(0.8,0)
  silkscreen extent -0.1,-0.53 0.1,0.53, body extent -1.05,-0.67 1.05,0.68, height 0.6
RESC2013X60X35ML10T20 [mm]
  rect 1.2x1.45 smd: 1(-1,0) 2(1,0)
  silkscreen extent -0.1,-0.62 0.1,0.62, body extent -1.05,-0.68 1.05,0.67, height 0.6
RESC2013X60X35NL10T20 [mm] "Chip Resistor, 2-Leads, Body 2.1x1.35mm, IPC Medium Density"
  rect 1x1.35 smd: 1(-0.9,0) 2(0.9,0)
  silkscreen extent -0.1,-0.58 0.1,0.58, body extent -1.05,-0.68 1.05,0.67, height 0.6
RESC2013X70X40NL20T20 [mm] "Chip Resistor, 2-Leads, Body 2.00x1.25mm, IPC Medium Density"
  rect 1.15x1.45 smd: 1(-0.875,0) 2(0.875,0)
  body extent -1.1,-0.72 1.1,0.72, height 0.7
SMB_V-RJ45 [mm] "Connector; SMB Straight"
  round 2.5 hole 1.5: 1(0,0) 2(-2.5,2.5) 2(-2.5,-2.5) 2(2.5,2.5) 2(2.5,-2.5)
  silkscreen extent -3.15,-3.15 3.15,3.15
SOT-223_L [mm] "SOT223, 4-Leads, Body 6.5x3.5mm, Pitch 2.3mm, Lead Span 7mm, IPC High Density"
  rect 2.1x0.9 smd: 1(-2.85,2.3) 2(-2.85,0) 3(-2.85,-2.3)
  rect 2.1x3.2 smd: 4(2.85,0)
  silkscreen extent -2.97,-3.35 1.5,3.42, body extent -1.85,-3.35 1.85,3.35, height 1.8
STM-LQFP48_L [mm] "QFP, 48-Leads, Body 7x7mm, Pitch 0.5mm, IPC High Density"
  oval 1.55x0.25 smd: 1(-4.025,2.75) 2(-4.025,2.25) 3(-4.025,1.75) 4(-4.025,1.25) 5(-4.025,0.75) 6(-4.025,0.25) 7(-4.025,-0.25) 8(-4.025,-0.75) 9(-4.025,-1.25) 10(-4.025,-1.75) 11(-4.025,-2.25) 12(-4.025,-2.75) 25(4.025,-2.75) 26(4.025,-2.25) 27(4.025,-1.75) 28(4.025,-1.25) 29(4.025,-0.75) 30(4.025,-0.25) 31(4.025,0.25) 32(4.025,0.75) 33(4.025,1.25) 34(4.025,1.75) 35(4.025,2.25) 36(4.025,2.75)
  oval 0.25x1.55 smd: 13(-2.75,-4.025) 14(-2.25,-4.025) 15(-1.75,-4.025) 16(-1.25,-4.025) 17(-0.75,-4.025) 18(-0.25,-4.025) 19(0.25,-4.025) 20(0.75,-4.025) 21(1.25,-4.025) 22(1.75,-4.025) 23(2.25,-4.025) 24(2.75,-4.025) 37(2.75,4.025) 38(2.25,4.025) 39(1.75,4.025) 40(1.25,4.025) 41(0.75,4.025) 42(0.25,4.025) 43(-0.25,4.025) 44(-0.75,4.025) 45(-1.25,4.025) 46(-1.75,4.025) 47(-2.25,4.025) 48(-2.75,4.025)
  silkscreen extent -4.15,-2.85 2.85,3.55, body extent -3.5,-3.5 3.5,3.5, height 1.6
TP_TH [mm] "Test Point, Through Hole, Dia 2.54mm"
  round 1.5 hole 1: 1(0,0)
  silkscreen extent -1.27,-1.27 1.27,1.27, body extent -1.27,-1.27 1.27,1.27, height 4.57

## Part data
C1 C2 C3 C6 C9 C17 C20 C22 C23 C37 C45 C63 C70: library part CMP-13271-000015-1, "CAP CER 10UF 16V X7R 0805", Capacitance=10uF, Manufacturer="Samsung Electro-Mechanics", Package=0, Temperature="-55°C to +125°C", Temperature Characteristic=X7R, Temperature Coefficient=15%, Temperature Range High=+125°C, Temperature Range Low=-55°C, Tolerance=10%, Voltage Rating=16V, Automotive=No, Category=Cap, ComponentLink2Description=Datasheet, ComponentLink2URL=http://product.samsungsem.com/mlcc/CL21B106KOQNNN.do, Device Class L1="Passive Components", Device Class L2=Capacitors, Device Class L3="Ceramic Capacitors", Digikey Description="CAP CER 10UF 16V X7R 0805", Height=1.4mm, Ipc Land Pattern Name=CAPC200125X125, Lead Free=Yes, Manufacturer Part Number=CL21B106KOQNNNG, Material=Ceramic, Octopart=https://octopart.com/cl21b106koqnnng-samsung-19995691, RoHS=TRUE
C4 C10 C38 C46 C64 C71: library part CMP-06035-031349-1, "Chip Multilayer Ceramic Capacitors for General Purpose, 0805, 4.7uF, X7R, 15%, 10%, 16V", Capacitance=4.7uF, Case/Package=0805, Dielectric=X7R, Tolerance=10%, Voltage Rating (DC)=16V, Length=2mm, Thickness=1.25mm, Width=1.25mm
C5 C11 C39 C47 C48 C50 C55 C65 C72 C73 C74: library part CMP-2007-00279-2, "CAP CER 0.1UF 50V X7R 0805", Capacitance="0.10 μF", Manufacturer=KEMET, Package=C0805C-DN, Temperature="-55°C to +125°C", Temperature Characteristic=X7R, Temperature Coefficient=30ppm/°C, Temperature Range High=+125°C, Temperature Range Low=-55°C, Tolerance=0.1, Voltage Rating="50 V", Automotive=No, Category=Cap, ComponentLink2Description=Datasheet, ComponentLink2URL=https://content.kemet.com/datasheets/KEM_C1003_C0G_SMD.pdf, Device Class L1="Passive Components", Device Class L2=Capacitors, Device Class L3="Ceramic Capacitors", Digikey Description="CAP CER 0.1UF 50V X7R 0805", Height=0.88mm, Ipc Land Pattern Name=CAPC200125X78, Lead Free=Yes, Manufacturer Part Number=C0805C104K5RACTU, Material=Ceramic, Mouser Description="Cap Ceramic 0.1uF 50V X7R 10% SMD 2.0 x 1.2 mm 125 C Paper T/R", Octopart=https://octopart.com/c0805c104k5ractu-kemet-143926, RoHS=TRUE
C7 C8: library part CMP-2007-03708-1, Manufacturer=Kemet, Part Number=C0805F103K5RACTU
C12 C13 C14 C53 C61: library part CMP-2007-01097-2, "CAP CER 1000PF 50V X7R 0805", Capacitance="1,000 pF", Manufacturer=KEMET, Package=C0805C-DN, Temperature="-55°C to +125°C", Temperature Characteristic=X7R, Temperature Coefficient=30ppm/°C, Temperature Range High=+125°C, Temperature Range Low=-55°C, Tolerance=0.1, Voltage Rating="50 V", Automotive=No, Category=Cap, ComponentLink2Description=Datasheet, ComponentLink2URL=https://content.kemet.com/datasheets/KEM_C1003_C0G_SMD.pdf, Device Class L1="Passive Components", Device Class L2=Capacitors, Device Class L3="Ceramic Capacitors", Digikey Description="CAP CER 1000PF 50V X7R 0805", Height=0.88mm, Ipc Land Pattern Name=CAPC200125X78, Lead Free=Yes, Manufacturer Part Number=C0805C102K5RACTU, Material=Ceramic, Mouser Description="Cap Ceramic 0.001uF 50V X7R 10% SMD 0805 125C Plastic T/R", Octopart=https://octopart.com/c0805c102k5ractu-kemet-93010, RoHS=TRUE
C15: library part CMP-13271-003813-1, "CL21 Series 0805 1uF 25V ±10% Tolerance X7R Multilayer Ceramic Chip Capacitor", Capacitance=1uF, Case Code (Imperial)=0805, Case Code (Metric)=2012, Dielectric=X7R, Max Operating Temperature=125°C, Min Operating Temperature=-55°C, Package Quantity=3000, Tolerance=10%, Voltage=25V, Case/Package=0805, Depth=1.25mm, Height=1.25mm, Length=2mm, Material=Ceramic, Mount="Surface Mount", Packaging="Tape and Reel", Radiation Hardening=No, Thickness=0.053inch, Voltage Rating=25V, Width=0.049inch
C16: library part CMP-13271-000077-1, "CL21 Series 0805 2.2nF 50V ±5% Tolerance X7R Multilayer Ceramic Chip Capacitor", Capacitance=2.2nF, Case Code (Imperial)=0805, Case Code (Metric)=2012, Dielectric=X7R, Max Operating Temperature=125°C, Min Operating Temperature=-55°C, Package Quantity=4000, Tolerance=5%, Voltage=50V, Case/Package=0805, Contact Plating=Tin, Depth=1.25mm, Height=0.65mm, Lead Free="Lead Free", Length=2mm, Mount="Surface Mount", Packaging="Tape and Reel", Radiation Hardening=No, Thickness=0.03inch, Voltage Rating=50V, Voltage Rating (DC)=50V, Width=0.049inch
C18 C19 C21: library part CMP-03020-023493-1, "CAP CER SMD 0805 15PF 50V 10% X7", Capacitance="15 pF", Manufacturer=KEMET, Package=C0805C-DN, Temperature="-55°C to +125°C", Temperature Characteristic=X7R, Temperature Coefficient=30ppm/°C, Temperature Range High=+125°C, Temperature Range Low=-55°C, Tolerance=0.1, Voltage Rating="50 V", Automotive=No, Category=Cap, ComponentLink2Description=Datasheet, ComponentLink2URL=https://content.kemet.com/datasheets/KEM_C1003_C0G_SMD.pdf, Device Class L1="Passive Components", Device Class L2=Capacitors, Device Class L3="Ceramic Capacitors", Digikey Description="CAP CER SMD 0805 15PF 50V 10% X7", Height=0.88mm, Ipc Land Pattern Name=CAPC200125X78, Lead Free=Yes, Manufacturer Part Number=C0805C150K5RACTU, Material=Ceramic, Mouser Description="Cap Ceramic 15pF 50V X7R 10% SMD 0805 125°C Paper T/R", Octopart=https://octopart.com/c0805c150k5ractu-kemet-88373275, RoHS=TRUE
C24 C29 C30: library part CMP-2000-07530-2, "CAP CER 10UF 50V X7R 1206", Manufacturer=Samsung, Manufacturer Part Number=CL31B106KBHNNNE, Temperature="-55°C to +125°C", Temperature Characteristic=X7R, Temperature Coefficient=15%, Temperature Range High=+125°C, Temperature Range Low=-55°C, Tolerance=10%, Voltage Rating=50V, Automotive=No, Capacitance=10uF, Category=Cap, ComponentLink2Description=Datasheet, ComponentLink2URL=http://www.samsungsem.com/global/front/downloadcms.do?path=%2F%2Fglobal%2F%2Fsupport%2F%2Fproduct-search%2F%2Fmlcc%2F%2F__icsFiles%2F%2Fafieldfile%2F%2F2019%2F%2F06%2F%2F18&fileName=CL31B106KBHNNNE-19.pdf, Device Class L1="Passive Components", Device Class L2=Capacitors, Device Class L3="Ceramic Capacitors", Digikey Description="CAP CER 10UF 50V X7R 1206", Height=1.8mm, Lead Free=Yes, Material=Ceramic, Octopart=https://octopart.com/cl31b106kbhnnne-samsung-30507377, Package=CL31B106KBHNNNE, RoHS=TRUE
C25: library part CC0805, "Chip capacitor", Voltage=50V, Series=X7R
C31: library part CMP-2000-05002-2, "CAP CER 0.1UF 16V X7R 0603", Capacitance="100 nF", Manufacturer=YAGEO, Manufacturer Part Number=CC0603KRX7R7BB104, Package=CC0603-DA, Temperature="-55°C to +125°C", Temperature Characteristic=X7R, Temperature Coefficient=15%, Temperature Range High=+125°C, Temperature Range Low=-55°C, Tolerance=0.1, Voltage="16 V", Automotive=No, Category=Cap, ComponentLink2Description=Datasheet, ComponentLink2URL=http://www.yageo.com/documents/recent/UPY-GPHC_X7R_6.3V-to-50V_18.pdf, Device Class L1="Passive Components", Device Class L2=Capacitors, Device Class L3="Ceramic Capacitors", Digikey Description="CAP CER 0.1UF 16V X7R 0603", Footprint Url=http://www.yageo.com/exep/pages/download/literatures/UPY-C_GEN_24.pdf, Height=0.9mm, Lead Free=Yes, Material=Ceramic, Mouser Description="Multilayer Ceramic Capacitor, CC Series, 0.1 - F, - 10%, X7R, 16 V, 0603 [1608 Metric]", Octopart=https://octopart.com/cc0603krx7r7bb104-yageo-192941, RoHS=TRUE, Voltage Rating="16 V"
C32: library part CMP-13271-003582-1, "Cap Ceramic 2.2uF 10V X7R ±10% Pad SMD 0603 +125°C T/R", Capacitance=2.2uF, Case Code (Imperial)=0603, Case Code (Metric)=1608, Dielectric=X7R, Max Operating Temperature=125°C, Min Operating Temperature=-55°C, Package Quantity=1, Tolerance=10%, Voltage Rating=10V, Case/Package=0603, Contact Plating=Tin, Depth=0.8mm, Height=0.8mm, Length=1.6mm, Material=Ceramic, Mount="Surface Mount", Packaging="Tape and Reel", Radiation Hardening=No, Thickness=0.035inch, Width=0.031inch
C33 C54 C56 C59 C60: library part CMP-03020-021676-1, "C0805 10 pF X7R 30ppm/°C 5.00% 50 V", Capacitance="10 pF", Manufacturer=KEMET, Package=C0805C-DN, Temperature="-55°C to +125°C", Temperature Characteristic=X7R, Temperature Coefficient=30ppm/°C, Temperature Range High=+125°C, Temperature Range Low=-55°C, Tolerance=0.05, Voltage Rating="50 V", Automotive=No, Category=Cap, ComponentLink2Description=Datasheet, ComponentLink2URL=https://content.kemet.com/datasheets/KEM_C1003_C0G_SMD.pdf, Device Class L1="Passive Components", Device Class L2=Capacitors, Device Class L3="Ceramic Capacitors", Height=0.88mm, Ipc Land Pattern Name=CAPC200125X78, Lead Free=Yes, Manufacturer Part Number=C0805C100J5RACTU, Material=Ceramic, Mouser Description="Cap, 10PF, 50V, Mlcc, 0805", Octopart=https://octopart.com/c0805c100j5ractu-kemet-81794931, RoHS=TRUE
C34: library part CMP-03020-021676-1, "C0805 10 pF X7R 30ppm/°C 5.00% 50 V", Capacitance="10 pF", Manufacturer=KEMET, Manufacturer Part Number=C0805C100J5RACTU, Package=C0805C-DN, Temperature="-55°C to +125°C", Temperature Characteristic=X7R, Temperature Coefficient=30ppm/°C, Temperature Range High=+125°C, Temperature Range Low=-55°C, Tolerance=0.05, Voltage Rating="50 V", Automotive=No, Category=Cap, ComponentLink2Description=Datasheet, ComponentLink2URL=https://content.kemet.com/datasheets/KEM_C1003_C0G_SMD.pdf, Device Class L1="Passive Components", Device Class L2=Capacitors, Device Class L3="Ceramic Capacitors", Height=0.88mm, Ipc Land Pattern Name=CAPC200125X78, Lead Free=Yes, Material=Ceramic, Mouser Description="Cap, 10PF, 50V, Mlcc, 0805", Octopart=https://octopart.com/c0805c100j5ractu-kemet-81794931, RoHS=TRUE
C35: library part CMP-2100-03606-3, "CAP CER 0.1UF 50V X7R 0805", Capacitance="100 nF", Manufacturer=Yageo, Manufacturer Part Number=CC0805KRX7R9BB104, Package=CC0805-0.85, Temperature="-30°C to +85°C", Temperature Characteristic=X7R, Temperature Range High=+85°C, Temperature Range Low=-30°C, Tolerance=0.1, Voltage Rating="50 V", Automotive=No, Category=Cap, ComponentLink2Description=Datasheet, ComponentLink2URL=http://www.yageo.com/documents/recent/UPY-GPHC_Y5V_6.3V-to-50V_8.pdf, Device Class L1="Passive Components", Device Class L2=Capacitors, Device Class L3="Ceramic Capacitors", Digikey Description="CAP CER 0.1UF 50V X7R 0805", Footprint Url=http://www.yageo.com/exep/pages/download/literatures/UPY-C_GEN_24.pdf, Height=0.95mm, Ipc Land Pattern Name=CAPC200125X85, Lead Free=Yes, Material=Ceramic, Mouser Description="Multilayer Ceramic Capacitors MLCC - SMD/SMT 100nF 50V X7R 10%", Octopart=https://octopart.com/cc0805krx7r9bb104-yageo-192993, RoHS=TRUE
C36 C44 C51 C52 C57 C58 C69: library part CMP-2007-03234-1, Manufacturer=Kemet, Part Number=C0805C105K3RACTU
C40 C41 C42 C43: library part CMP-2100-03606-3, "CAP CER 0.1UF 50V X7R 0805", Capacitance="100 nF", Manufacturer=Yageo, Package=CC0805-0.85, Temperature="-30°C to +85°C", Temperature Characteristic=X7R, Temperature Range High=+85°C, Temperature Range Low=-30°C, Tolerance=0.1, Voltage Rating="50 V", Automotive=No, Category=Cap, ComponentLink2Description=Datasheet, ComponentLink2URL=http://www.yageo.com/documents/recent/UPY-GPHC_Y5V_6.3V-to-50V_8.pdf, Device Class L1="Passive Components", Device Class L2=Capacitors, Device Class L3="Ceramic Capacitors", Digikey Description="CAP CER 0.1UF 50V X7R 0805", Footprint Url=http://www.yageo.com/exep/pages/download/literatures/UPY-C_GEN_24.pdf, Height=0.95mm, Ipc Land Pattern Name=CAPC200125X85, Lead Free=Yes, Manufacturer Part Number=CC0805KRX7R9BB104, Material=Ceramic, Mouser Description="Multilayer Ceramic Capacitors MLCC - SMD/SMT 100nF 50V X7R 10%", Octopart=https://octopart.com/cc0805krx7r9bb104-yageo-192993, RoHS=TRUE
C49: library part CMP-08246-006241-1, "Multilayer Ceramic Capacitors 2.2μF ±10% 16V X7R SMD 0805", Capacitance=2.2uF, Case Code (Imperial)=0805, Case Code (Metric)=2012, Dielectric=X7R, Dielectric Material=Ceramic, Max Operating Temperature=125°C, Min Operating Temperature=-55°C, Package Quantity=2000, Tolerance=10%, Voltage=16V, Case/Package=0805, Construction=Flat, Depth=1.25mm, Height=1.25mm, Lead Free="Lead Free", Length=2mm, Mount="Surface Mount", Number of Pins=2, Packaging="Tape and Reel", Radiation Hardening=No, REACH SVHC="No SVHC", Resistor Type=Ceramic, RoHS Compliant=Yes, Series=C, Termination=SMD/SMT, Thickness=0.057inch, Voltage Rating=16V, Voltage Rating (DC)=16V, Weight=0.000194oz, Width=1.25mm
D1: library part LED, AF=1, BV=0, BV_MAX=1e99, CJO=0, CJP=0, CTA=0, CTP=0, EG=1.11, FC=0.5, FCS=0.5, FV_MAX=1e99, IBV=0.001, IKF=0, IKR=0, IS=1e-14, ISR=1e-14, JSW=0, JTUN=0, JTUNSW=0, KEG=1, KF=0, LEVEL=1, MJSW=0.33, N=1, NBV=1, NR=1, NS=1, NTUN=30, PHP=1, RS=0, SimulationGenericComponent=True, TCV=0, TLEV=0, TLEVC=0, TM1=0, TM2=0, TNOM=27, TPB=0, TPHP=0, TRS=0, TRS2=0, TT=0, TTT1=0, TTT2=0, VJ=1, XTI=3, XTITUN=3
DA1: library part MIC2288, "Step Up", FB_voltage=1.24V, Max Volt=10V
DD1: library part STM32F3_LQFP48, "Microcontroller"
J1: library part CMP-0029-00003-2, "CONN U.FL RCPT STR 50 OHM SMD", Case/Package=SMD/SMT, Dielectric Material=Polymer, Frequency=6GHz, Housing Color=Beige, Max Operating Temperature=90°C, Min Operating Temperature=-40°C, Package Quantity=1, Body Material=Bronze, Body Plating=Silver, Connector Type=Coaxial, Contact Material=Brass, Contact Plating=Gold, Depth=3.1mm, Fastening Type=Snap, Impedance=50R, Lead Free="Lead Free", Length=3mm, Max Frequency=6GHz, Mount="Surface Mount", Orientation=Vertical, Packaging="Tape and Reel", Plating=Silver, Radiation Hardening=No, Termination=Solder
J2 J3 J4 J8 J9: library part CMP-2000-05152-3, "CONN U.FL RCPT STR 50 OHM SMD", Dielectric Material=Polymer, Frequency=6GHz, Housing Color=Beige, Insulation Resistance=500MR, Max Operating Temperature=90°C, Min Operating Temperature=-40°C, Package Quantity=2500, Body Material=Bronze, Body Plating=Silver, Connector Type=Coaxial, Contact Material=Brass, Contact Plating=Gold, Depth=3.1mm, Fastening Type=Snap, Gender=Male, Impedance=50R, Lead Free="Lead Free", Length=3mm, Max Frequency=6GHz, Mount="Surface Mount", Orientation=Straight, Packaging="Cut Tape", Radiation Hardening=No, REACH SVHC="No SVHC", Series=U.FL, Termination=Solder, Weight=0.001764oz, Wire/Cable Type=Coaxial
J5 J6 J7: library part CMP-04776-000237-1, "CONN HEADER VERT 3POS 2.54MM", Color=Black, Contact Resistance=20mR, Current Rating=3A, Max Operating Temperature=125°C, Max Voltage Rating (DC)=350.35kV, Min Operating Temperature=-55°C, Voltage Rating=350V, Contact Gender=Male, Contact Material=Brass, Contact Mating Length=6.75mm, Contact Plating=Tin, Contact Post Length=2.9mm, Gender=Male, Glow Wire Compliant=Non-compliant, Housing Color=Black, Housing Material=Polyester, Lead Free="Lead Free", Mount="Through Hole", Number of Circuits=3, Number of Contacts=3, Number of Positions=3, Number of Rows=1, Orientation=Vertical, Packaging=Tray, Pitch=2.54mm, Radiation Hardening=No, REACH SVHC="No SVHC", RoHS Compliant=Yes, Series=90120, Termination=Solder, Voltage Rating (AC)=350V
L1 L2: "Ferrit Bead", Created data=2010-10-16
P1: "SMB Straight Connector", LatestRevisionDate=17-Jul-2002, LatestRevisionNote="Re-released for DXP Platform.", Publisher="Altium Limited"
P2 P5: "Header, 2-Pin", LatestRevisionDate=17-Jul-2002, LatestRevisionNote="Re-released for DXP Platform.", Publisher="Altium Limited"
P3 P7: "Header, 2-Pin, Dual row", LatestRevisionDate=17-Jul-2002, LatestRevisionNote="Re-released for DXP Platform.", Publisher="Altium Limited"
P4: "Header, 4-Pin, Dual row", LatestRevisionDate=17-Jul-2002, LatestRevisionNote="Re-released for DXP Platform.", Publisher="Altium Limited"
P6: library part CMP-1502-01070-3, Color=Black, Contact Resistance=20mΩ, Current Rating=3A, Max Operating Temperature=105°C, Min Operating Temperature=-40°C, Operating Supply Voltage=250V, Connector Type="Male Pin", Contact Gender=Male, Contact Material=Copper, Contact Mating Length=5.9944mm, Contact Plating=Gold, Gender=Male, Height=8.89mm, Housing Material=PBT, Lead Free="Lead Free", Lead Pitch=2.54mm, Mount="Through Hole", NexarPartId=20084590, Number of Contacts=6, Number of Pins=6, Number of Positions=6, Number of Rows=1, Orientation=Vertical, Packaging=Bulk, Pitch=2.54mm, REACH SVHC=Unknown, RoHS=Compliant, Termination="Through Hole", Voltage Rating=250V
Q1: library part CMP-1164-00353-1, "N-Channel CoolMOS C6 Power-Transistor, 600 V VDS, 8.1 A ID, -55 to 150 degC, PG-TO252-3-313, Reel, Green", Manufacturer=Infineon, PartNumber=IPD60R520C6, ComponentLink1Description="Manufacturer URL", ComponentLink1URL=http://www.infineon.com/, ComponentLink2Description=Datasheet, ComponentLink2URL=http://www.infineon.com/dgdl/IPD60R520C6_2.0.pdf?folderId=db3a3043163797a6011638933eda014b&fileId=db3a304323b87bc20123e676d18358fb, ComponentLink3Description="Package Specification", ComponentLink3URL=http://www.infineon.com/dgdl/PG-TO252-3-313-Package_Overview.pdf?folderId=db3a30432b57a660012b81890ade72d2&fileId=db3a30432b57a660012b8193af2872eb, DatasheetVersion="Rev. 2.0", Green=TRUE, ID (max)="8.1Â A", IDpuls (max)="22Â A", Mounting Technology="Surface Mount", PackageDescription="3-Pin Plastic (Green) Transistor Single Outline Package, 6.5 x 6.12 mm Body, 2.28 mm Pitch", PackageReference=PG-TO252-3-313, PackageVersion=Oct-10, Packing=Reel, Polarity=N, Ptot (max)="66Â W", QG="23.4Â nC", RDS (on) (max)="520Â mOhm", Rth="1.9Â K/W", RthJA (max)="62Â K/W", RthJC (max)="1.9Â K/W", Technology="CoolMOS C6", VDS (max)="600Â V", VGS(th) (max)="3.5Â V", VGS(th) (min)="2.5Â V"
R1 R2 R3 R5: library part CMP-2001-01840-1, Manufacturer="KOA Speer", Part Number=RK73B2ATTD510J
R4: library part CMP-2001-03660-1, Manufacturer="Vishay Dale", Part Number=CRCW0805200KFKEA
R6 R7 R11 R13 R14 R31: library part CMP-2100-03671-1, "Chip Resistor, 1 KOhm, +/- 1%, 125 mW, -55 to 155 degC, 0805 (2012 Metric), RoHS, Tape and Reel", Case Code (Imperial)=0805, Case Code (Metric)=2012, Manufacturer=Yageo, Max Operating Temperature=155degC, Max Power Dissipation=125mW, Min Operating Temperature=-55degC, Package Description="2-Pin Surface Mounted Device, Body 2 x 1.25 mm", Package Quantity=1, Resistance=1KOhm, Temperature Coefficient=100ppm/degreesC, Tolerance=1%, Voltage Rating=150V, Case/Package=0805, Composition=ThickFilm, Datasheet URL=http://www.yageo.com/NewPortal/yageodocoutput?fileName=/pdf/R-Chip/PYu-RC_Group_51_RoHS_L_5.pdf, Datasheet Version="Rev. 5, 10/2016", Depth=1.25mm, Height=0.024inch, Lead Free=LeadFree, Length=0.079inch, Manufacturer URL=http://www.yageo.com/, Military Standard=Not, Number of Pins=2, Number of Terminations=2, Package Reference=0805, Packaging=TapeandReel, Power rating=125mW, REACH SVHC=Unknown, RoHSCompliant=true, Termination=SMD/SMT, Voltage Rating (DC)=150V, Width=0.049inch
R8 R44: library part CMP-1665-00002-5, "Chip Resistor, 0 Ohm, +/- 1%, 0.125 W, -55 to 155 degC, 0805 (2012 Metric), RoHS, Tape and Reel", Case Code (Imperial)=0805, Case Code (Metric)=2012, Max Operating Temperature="155 degC", Min Operating Temperature="-55 degC", Package Quantity=5000, Resistance="0 Ohm", Tolerance=5%, Case/Package=0805, ComponentLink1Description="Manufacturer URL", ComponentLink1URL=http://www.panasonic.com/, ComponentLink2Description=Datasheet, ComponentLink2URL=http://industrial.panasonic.com/cdbs/www-data/pdf/RDA0000/AOA0000C84.pdf, DatasheetVersion=03/2015, Height="0.6 mm", Length="2 mm", Mounting Technology="Surface Mount", PackageDescription="2-Pin Surface Mount Device, Body 2 x 1.25 mm", Packaging="Tape and Reel", PartNumber=ERJ-6GEY0R00V, Radiation Hardening=No, REACH SVHC="No SVHC", RoHSCompliant=True, Width="1.25 mm"
R9 R10 R12 R46 R52: library part CMP-2001-01840-1, Manufacturer="KOA Speer", Part Number=RK73B2ATTD510J
R15 R16 R17 R40: library part CMP-2100-03669-1, "Chip Resistor, 100 Ohm, +/-1%, 0.125 W, -55 to 155 degC, 0805 (2012 Metric), RoHS, Tape and Reel", Case Code (Imperial)=0805, Case Code (Metric)=2012, Manufacturer=Yageo, Max Operating Temperature=155degC, Max Power Dissipation=125mW, Min Operating Temperature=-55degC, Package Description="2-Pin Surface Mounted Device, Body 2 x 1.25 mm", Package Quantity=1, Resistance=100Ohm, Temperature Coefficient=100ppm/degreesC, Tolerance=1%, Voltage Rating=150V, Case/Package=0805, Composition=ThickFilm, Datasheet URL=http://www.yageo.com/NewPortal/yageodocoutput?fileName=/pdf/R-Chip/PYu-RC_Group_51_RoHS_L_5.pdf, Datasheet Version="Rev. 5, 10/2016", Depth=1.25mm, Height=0.024inch, Lead Free=LeadFree, Lead Pitch=0.4mm, Length=2mm, Manufacturer URL=http://www.yageo.com/, Military Standard=Not, Number of Pins=2, Number of Terminations=2, Package Reference=0805, Packaging=TapeandReel, Power rating=125mW, REACH SVHC=Unknown, RoHSCompliant=true, Termination=SMD/SMT, Voltage Rating (DC)=150V, Width=0.049inch
R18 R19 R20 R21 R22 R23 R24 R25 R26 R27 R28 R29 R30: library part RC0805, "Chip resistor", Tolerance=5%
R32 R34: library part CMP-2001-01993-1, Manufacturer="KOA Speer", Part Number=RK73H2ATTD1002F
R35 R36 R37 R38 R39 R41 R43 R45 R47 R49 R50 R51 R53 R54 R55 R56 R57 R59 R60: library part CMP-1659-00015-4, "Chip Resistor, 33 Ohm, +/- 1%, 0.125 W, -55 to 155 degC, 0805 (2012 Metric), RoHS, Tape and Reel", Manufacturer=Yageo, Max Operating Temperature="155 degC", Min Operating Temperature="-55 degC", Package Quantity=5000, Voltage Rating="150 V", ComponentLink1Description="Manufacturer URL", ComponentLink1URL=http://www.yageo.com/, ComponentLink2Description=Datasheet, ComponentLink2URL=http://www.yageo.com/documents/recent/PYu-RC_Group_51_RoHS_L_04.pdf, DatasheetVersion="Rev. 4, 02/2016", Height="0.5 mm", Length="2 mm", Mount="Surface Mount", Mounting Technology="Surface Mount", PackageDescription="2-Pin Surface Mounted Device, Body 2 x 1.25 mm", PackageReference=0805, Packaging="Tape and Reel", Pins=2, REACH SVHC="No SVHC", RoHSCompliant=true
R42 R48: library part CMP-2001-01391-1, Manufacturer=Yageo, Part Number=RC0805JR-075R1L
R58: library part CMP-2001-02011-1, Manufacturer="KOA Speer", Part Number=RK73H2ATTD10R0F
TP1 TP2 TP3 TP4 TP5 TP6 TP7 TP8 TP9 TP10 TP11 TP12 TP13 TP14: library part TestPoint, "Test Point, Orange, 1-Pin THD, RoHS", Forward Current="3 A", Forward Voltage="1.08 V", Max Operating Temperature="150 degC", Max Surge Current="80 A", Min Operating Temperature="-65 degC", Package Quantity=500, Peak Reverse Current="600 uA", ComponentLink1Description="Manufacturer URL", ComponentLink1URL=http://www.keyelco.com/, ComponentLink2Description=Datasheet, ComponentLink2URL=http://keyelco.com/userAssets/file/M65p56.pdf, DatasheetVersion=Jun-15, Diameter="5.3 mm", Height="0.25 inch", Length="9.5 mm", Mount="Through Hole", PackageDescription="1-Pin Through Hole Device, Dia 2.54 mm", PackageReference=5003, Packaging=Bulk, Pins=2, Radiation Hardening=No, REACH SVHC="No SVHC", RoHSCompliant=true, Weight="0.01 lb", Width="0.25 inch"
U1: library part CMP-09116-000192-1, "IC OPAMP VFB 4 CIRCUIT 14TSSOP", Case/Package=TSSOP, Dual Supply Voltage=5V, Input Bias Current=1.2uA, Input Offset Voltage (Vos)=140uV, Max Operating Temperature=125°C, Max Supply Voltage=11V, Min Operating Temperature=-40°C, Min Supply Voltage=2.7V, Operating Supply Current=1mA, Output Current per Channel=80mA, Power Supply Rejection Ratio (PSRR)=98dB, Voltage Gain=130dB, -3db Bandwidth=180MHz, Common Mode Rejection Ratio=96dB, Gain Bandwidth Product=170MHz, Lead Free="Contains Lead", Mount="Surface Mount", Number of Circuits=4, Number of Pins=14, Packaging="Tape and Reel", RoHS Compliant=Yes, Slew Rate=225V/µs